# EAGLE board ENERGIS_Rack-PDU_1.0.0 (EAGLE 9.2.1), part 1 of 3
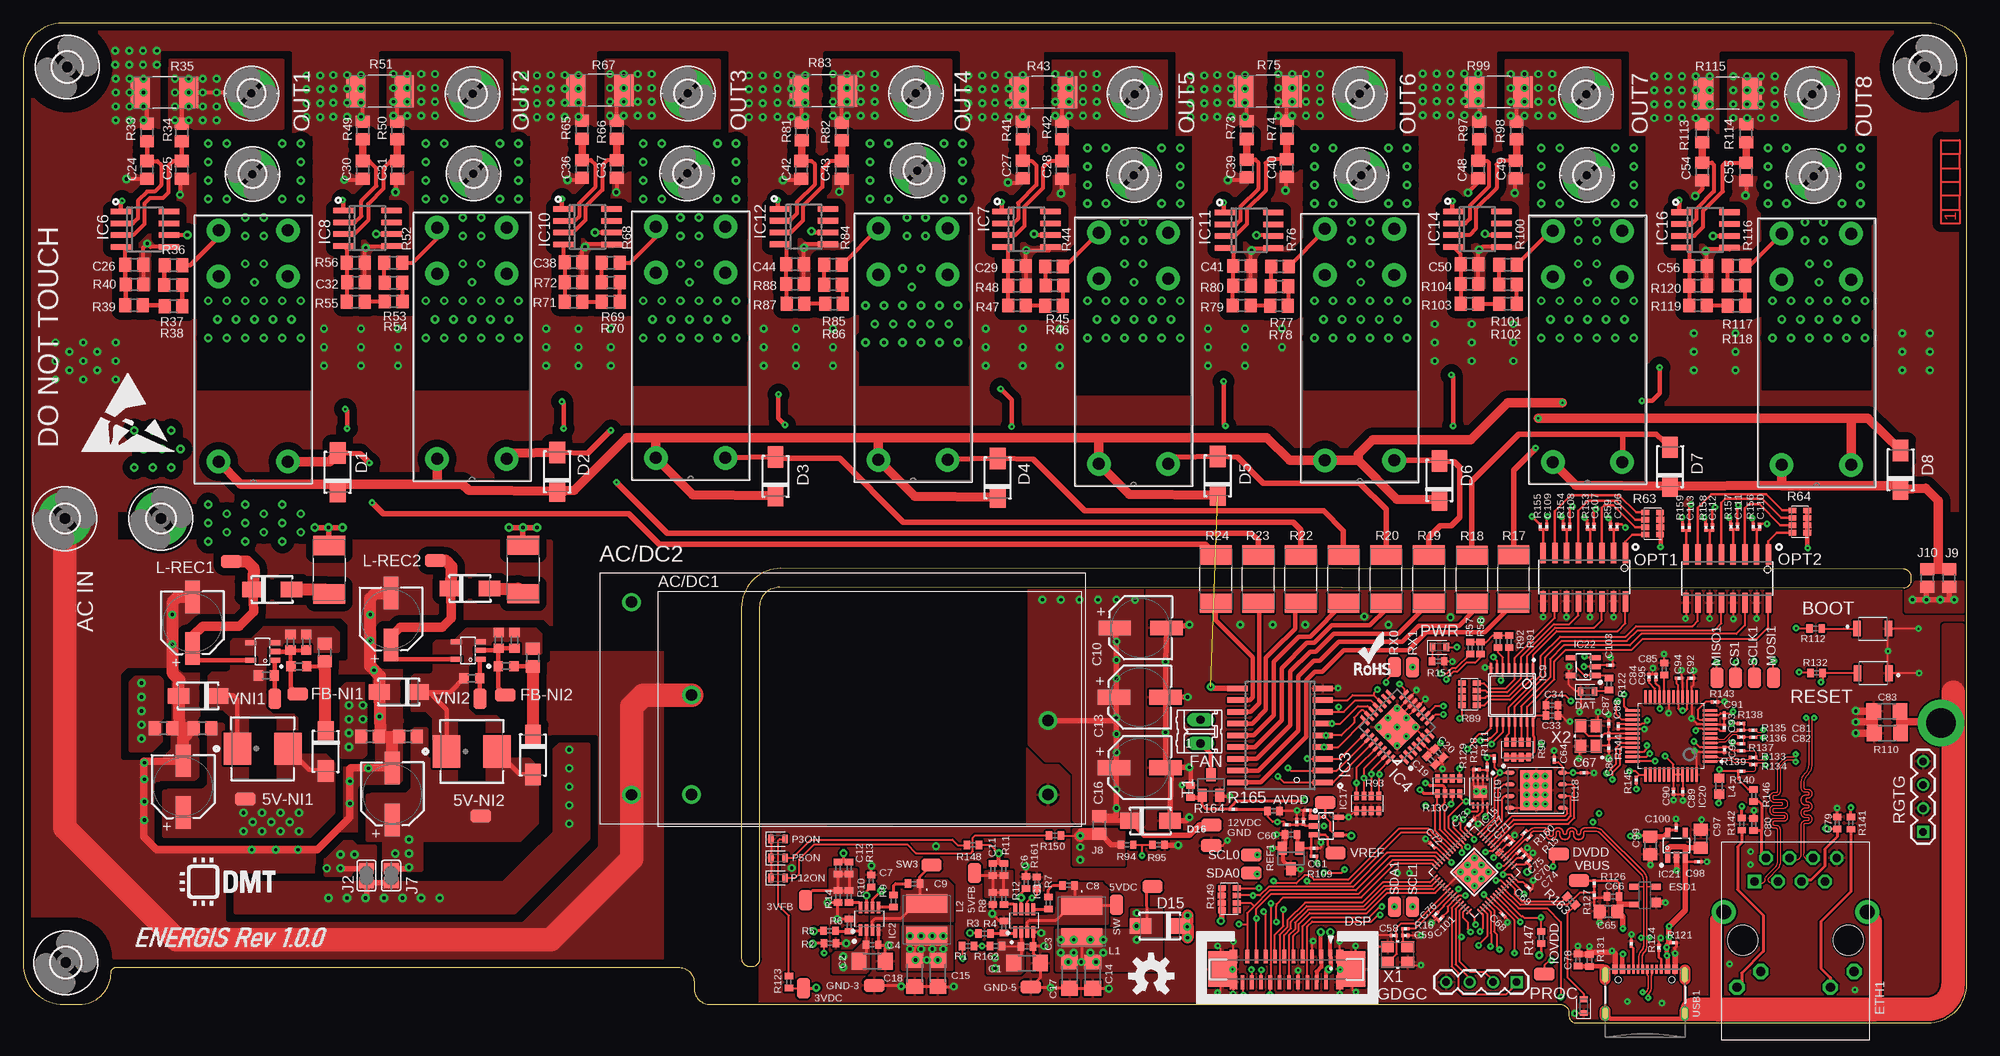
[diagram p0: board, top side]
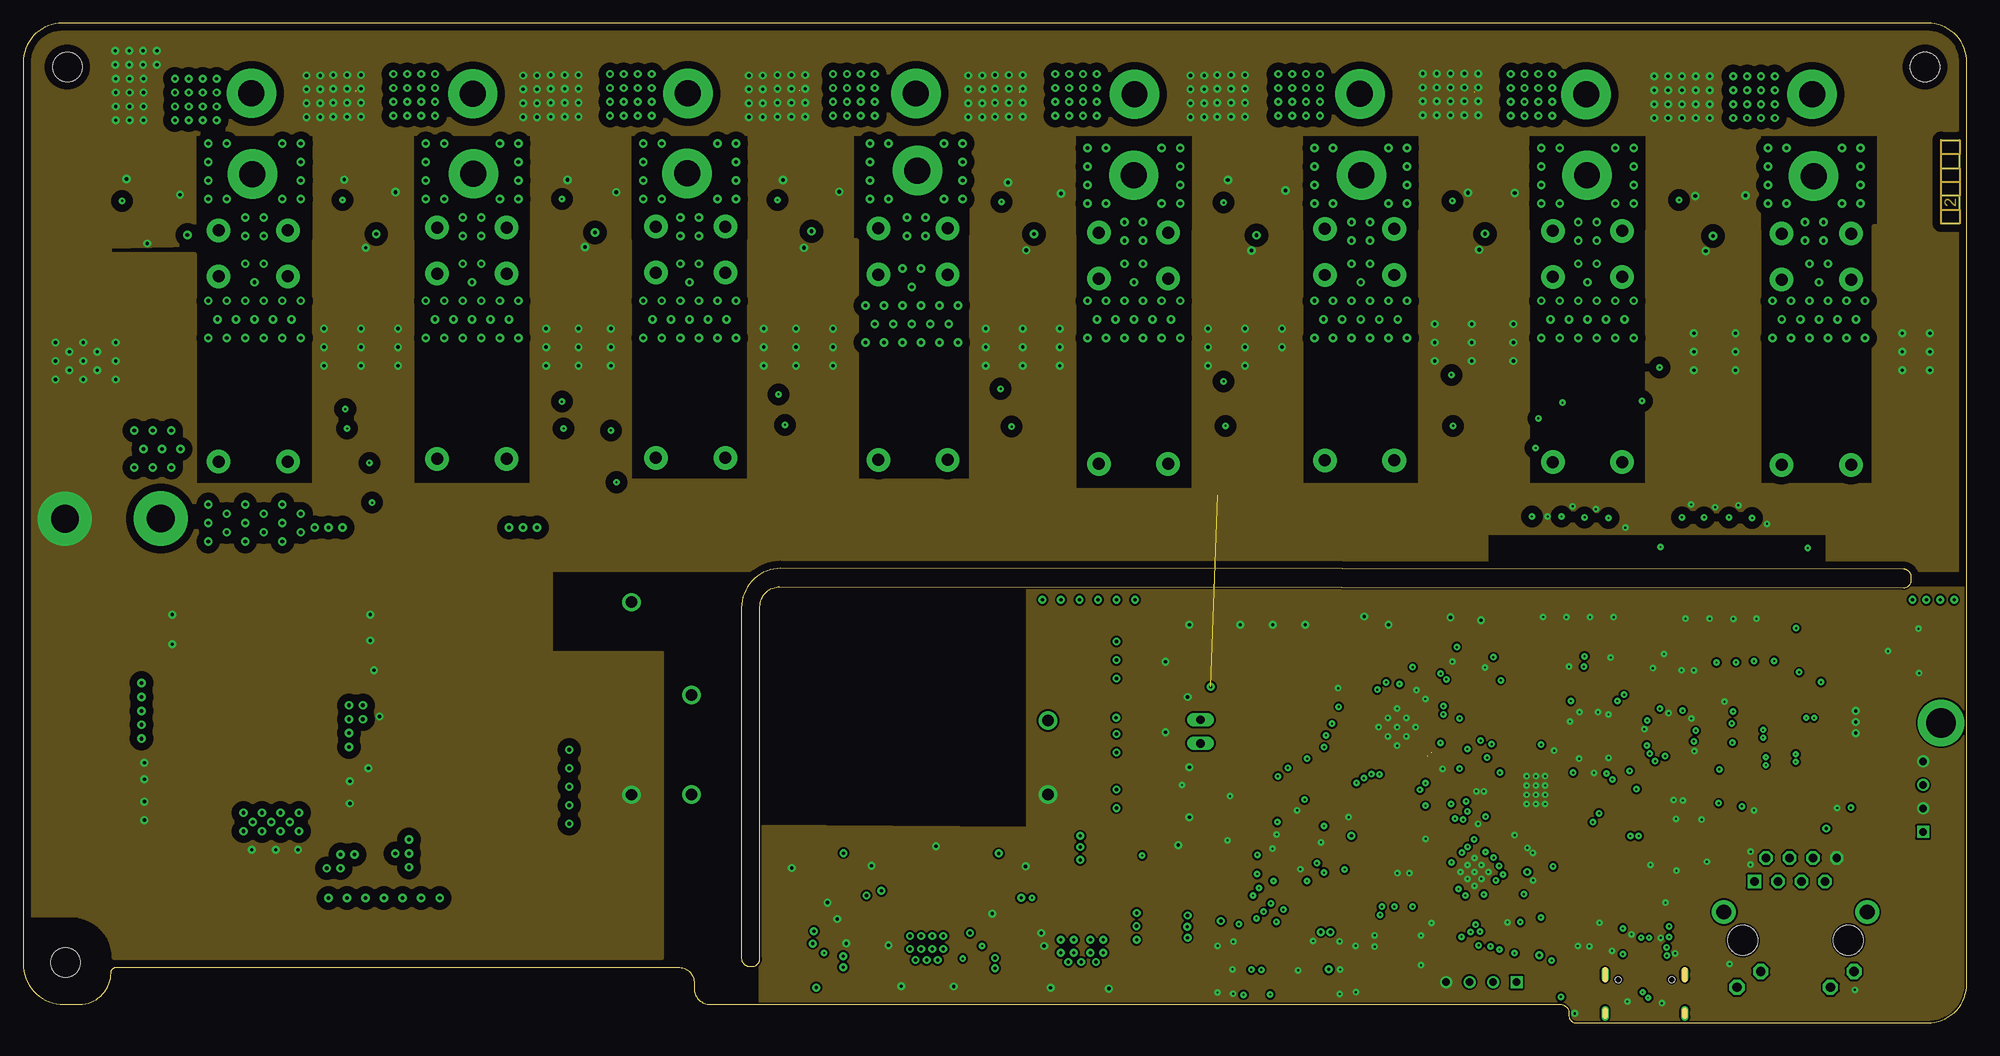
[diagram p1: board, inner layer GND/AGND]
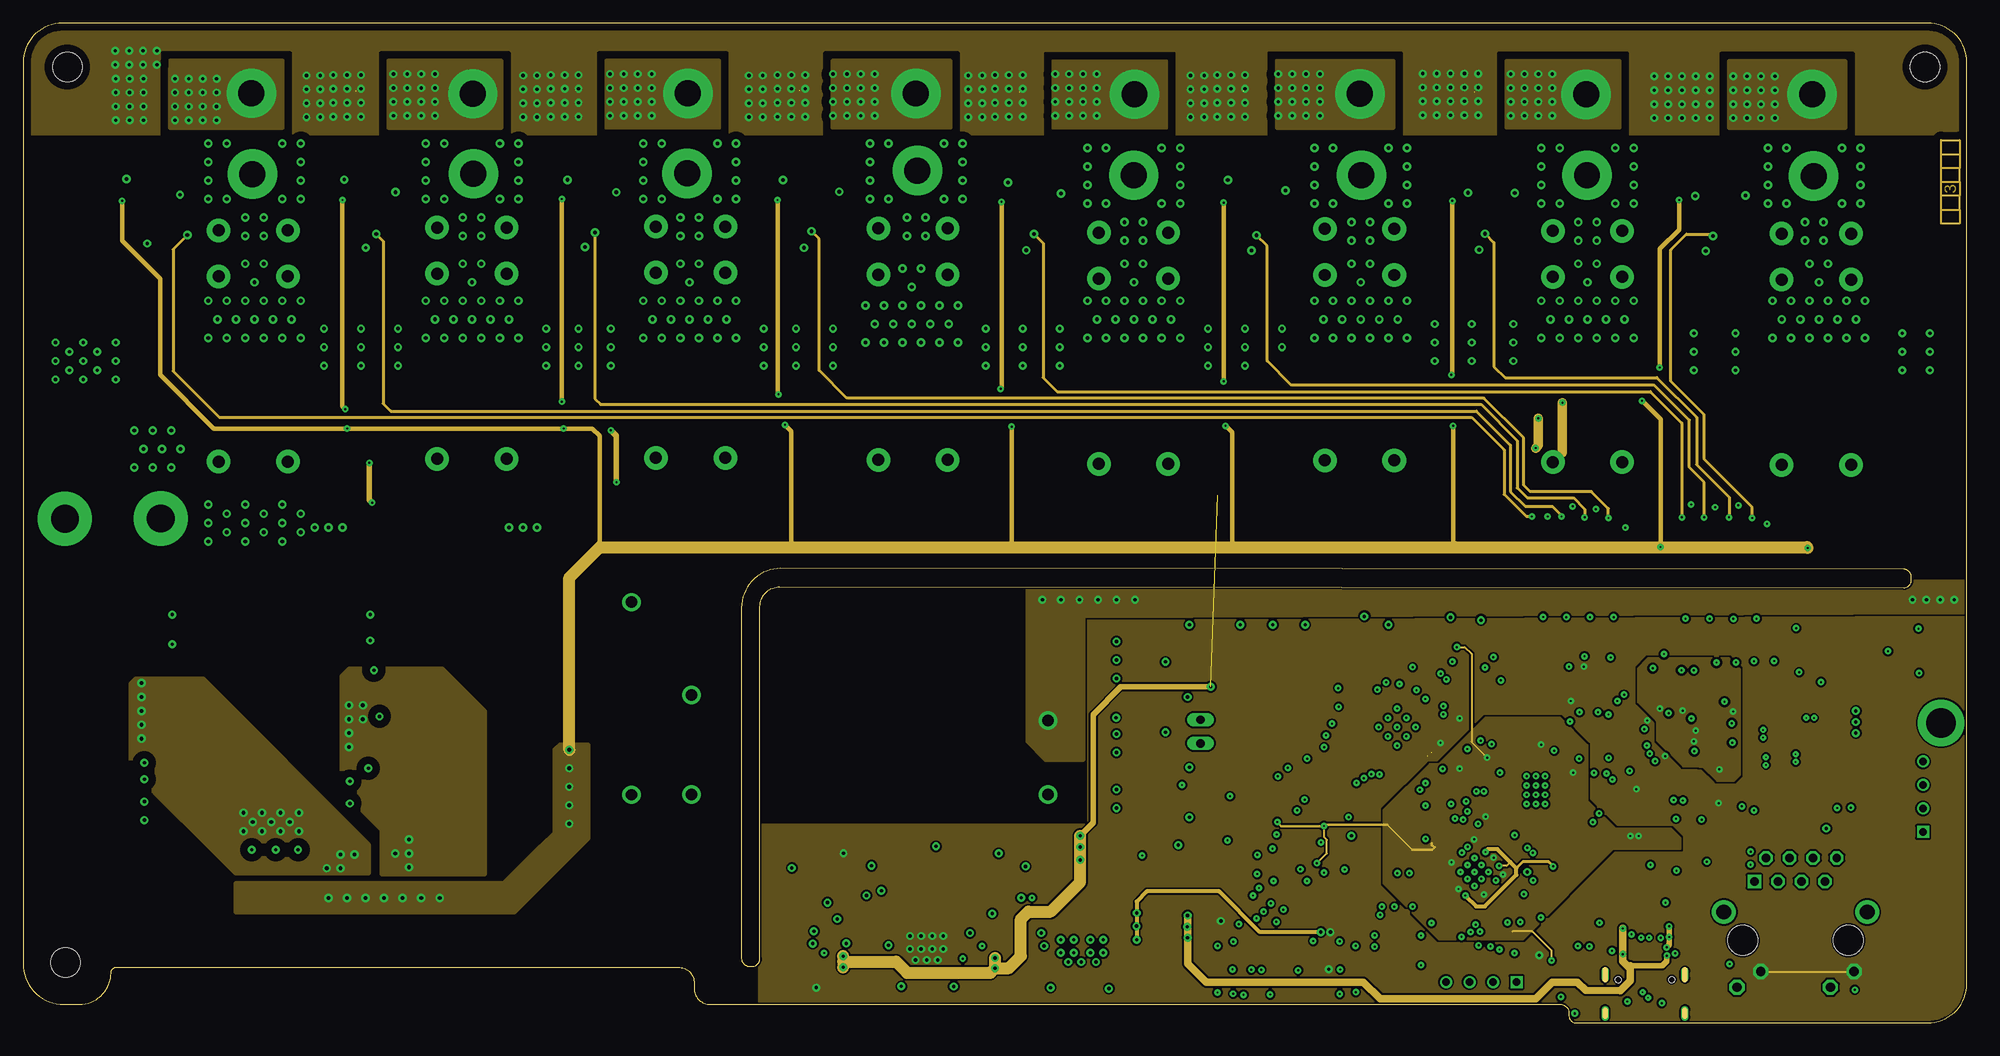
[diagram p2: board, inner layer PWR-3/SIG]
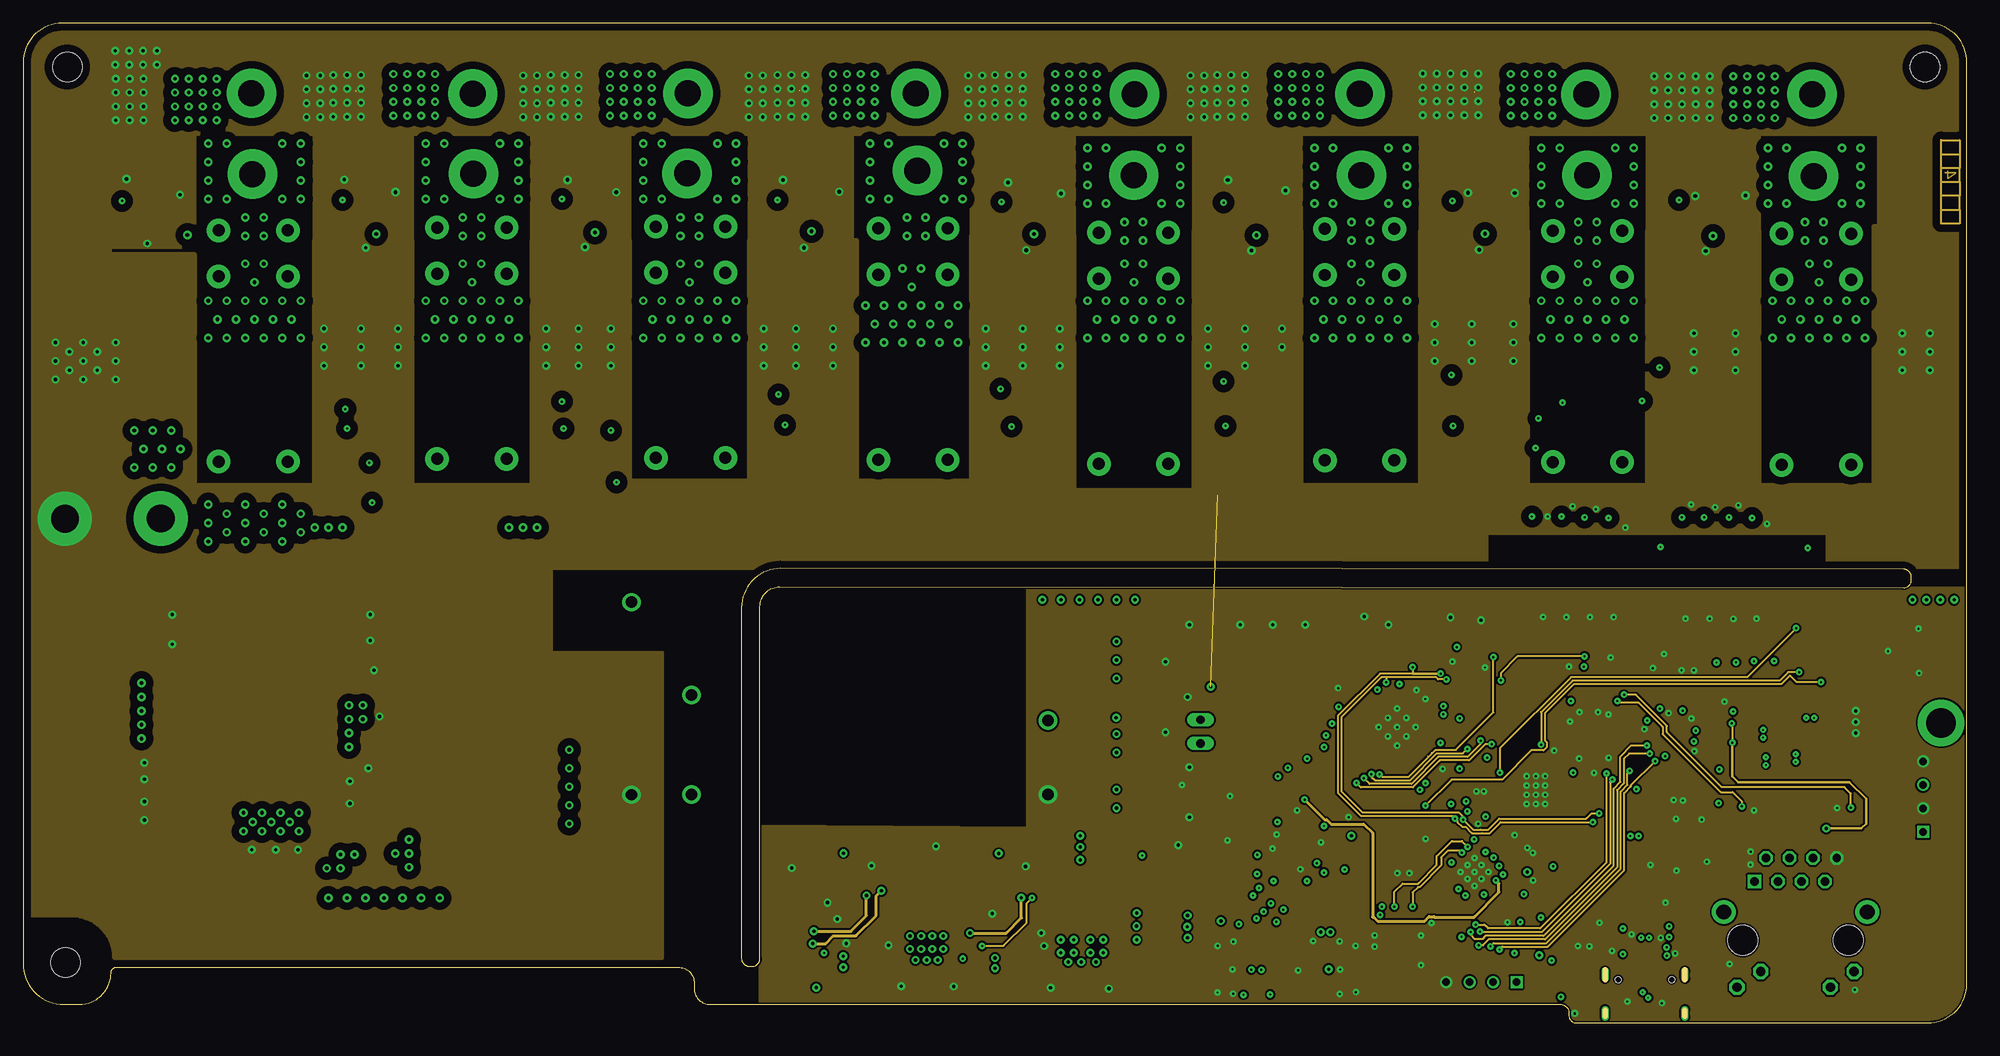
[diagram p3: board, inner layer SIG/AGND]
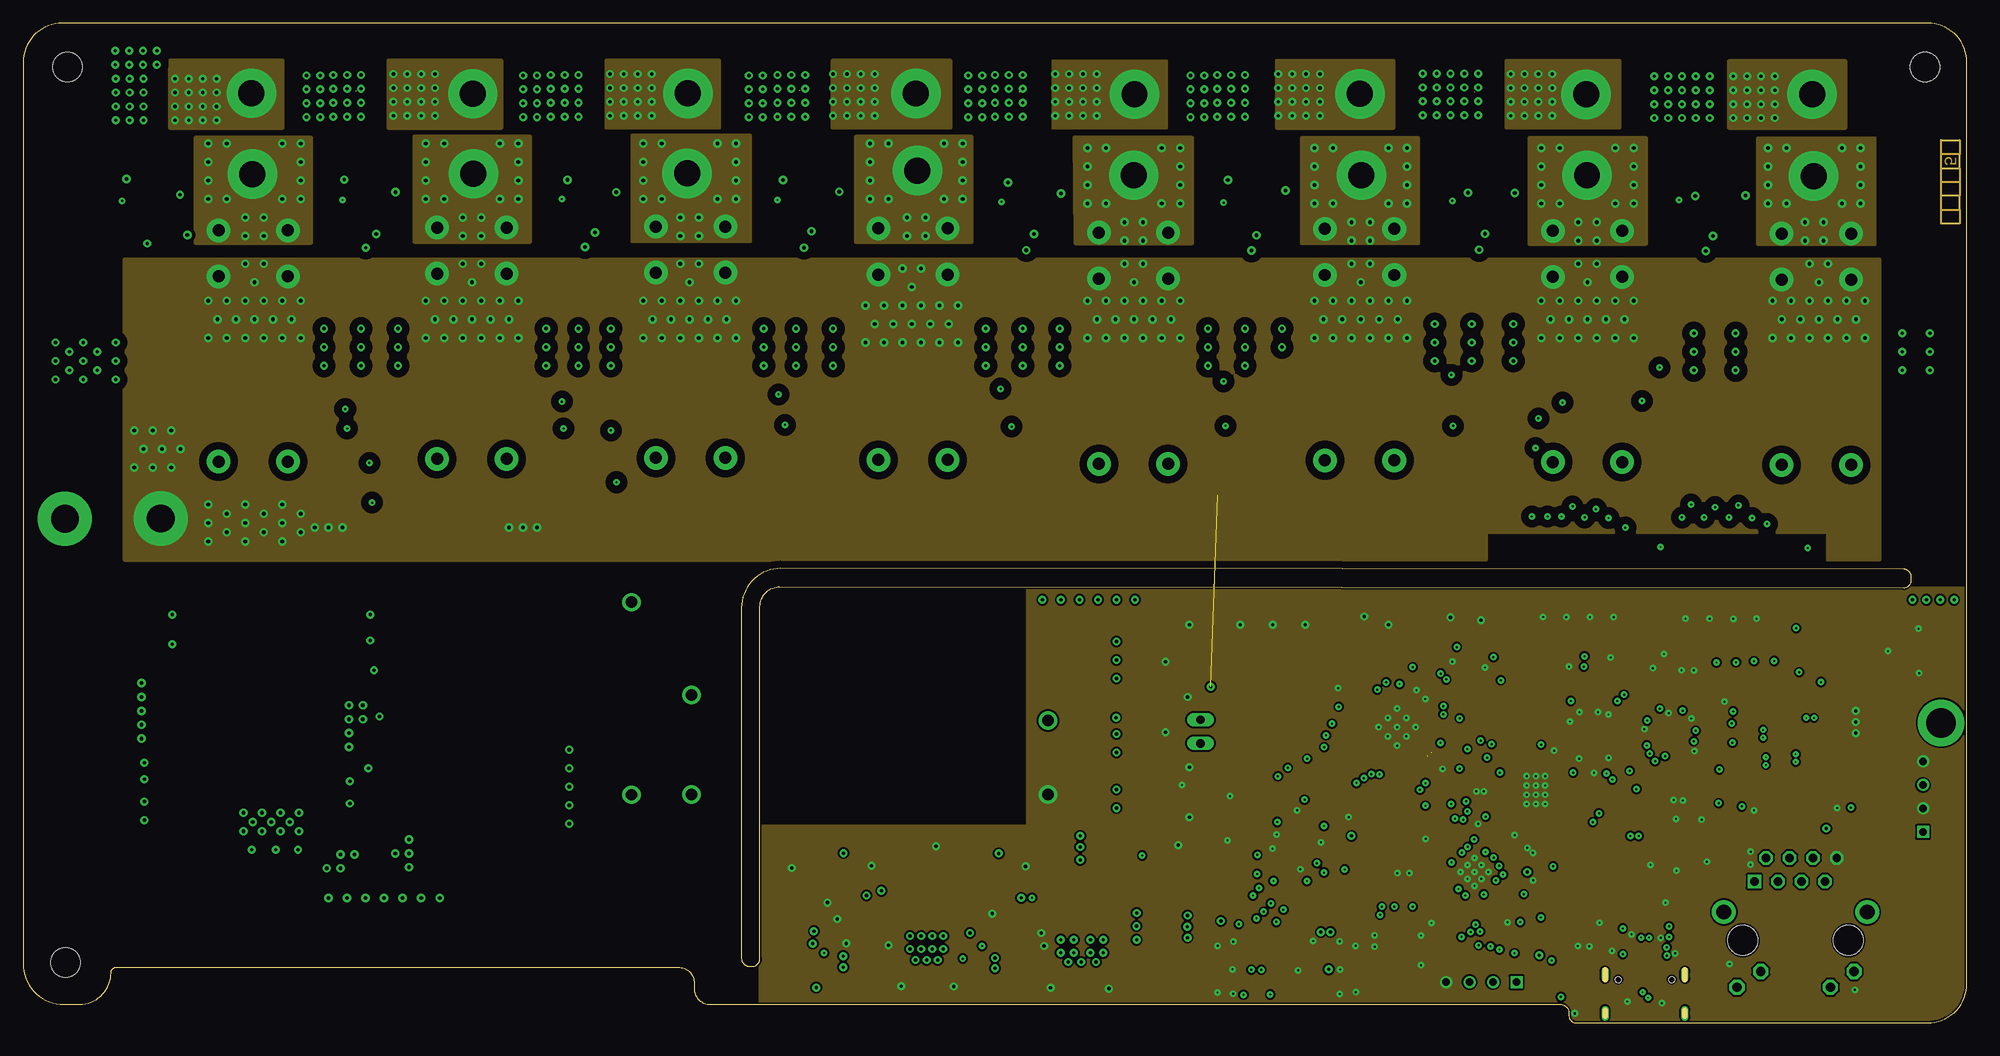
[diagram p4: board, inner layer GND-2/AC_L]
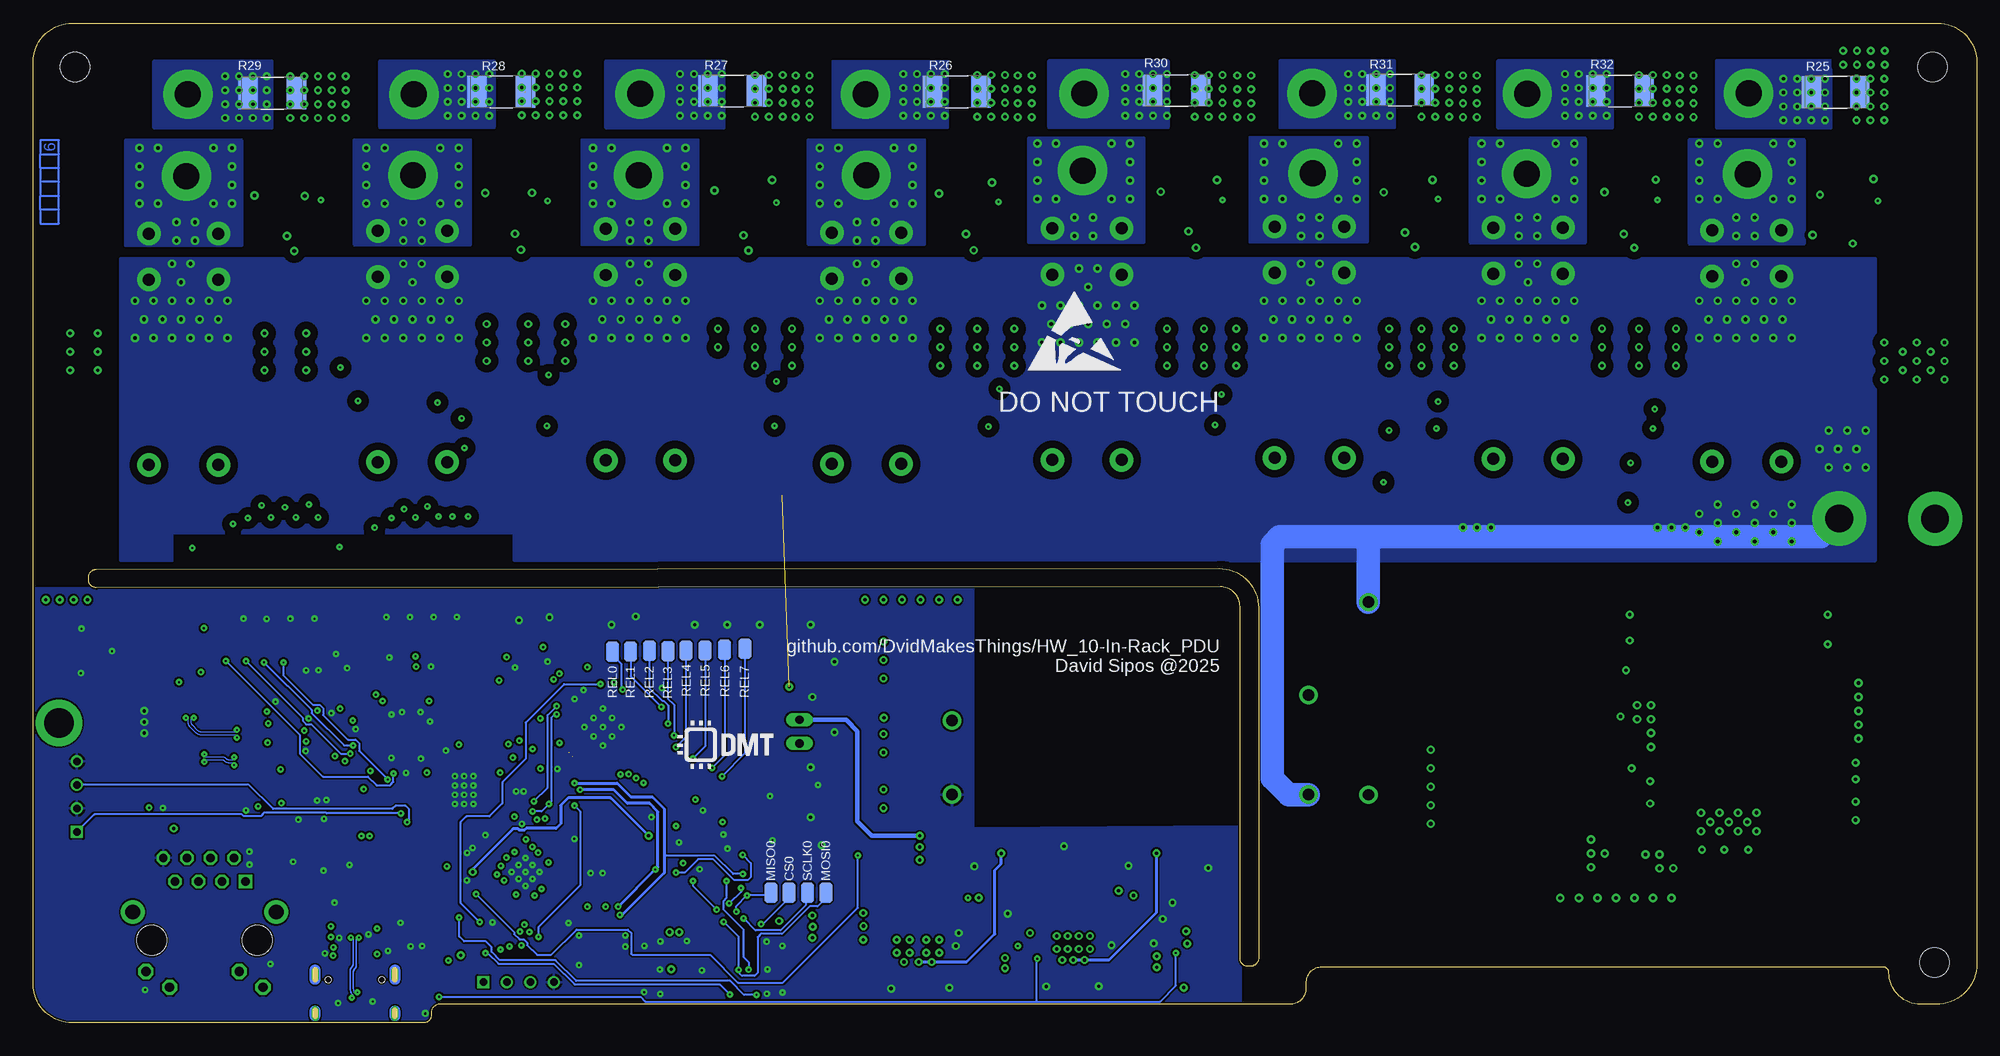
[diagram p5: board, bottom side, seen from below]

Size 210 x 108 mm. Coordinates in mm from the lower left corner, seen from the top.
Outline: 210,4.23 210,103.77 arc90 205.77,108 4.23,108 arc90 0,103.77 0,6.39 arc90 4.39,2 6.08,2 arc90 9.5,5.42 arc-90 10.08,6 70.79,6 arc-90 72.5,4.29 72.5,3.71 arc90 74.21,2 166.06,2 arc-90 167,1.06 167,0.77 arc90 167.77,0 205.77,0 arc90 210,4.23
Outline: 81.73,47.1 203.15,47 arc90 204,47.85 204,48.15 arc90 203.15,49 81.86,49.1 arc90 77.6,44.84 77.6,7 arc90 78.5,6.1 78.78,6.1 arc90 79.6,6.92 79.6,44.97 arc-90 81.73,47.1
Copper layers (1+2*3+14*15+16): SIG_HS/SIG 0.035mm / dielectric 0.0994mm / GND/AGND 0.0152mm / dielectric 0.55mm / PWR-3/SIG 0.0152mm / dielectric 0.1088mm / SIG/AGND 0.0152mm / dielectric 0.55mm / GND-2/AC_L 0.0152mm / dielectric 0.0994mm / SIG_BTM/AC_L 0.035mm
Design rules "JLC06161H-3313A_6-layer_1.6 mm-Standard": minimum track width 3.5mil, minimum drill 0.15mm, track to track 3.5mil, track to pad 3.5mil, pad to pad 3.5mil, via to via 3.5mil, smd to smd 3.5mil, copper to edge 0.2mm, drill to drill 6mil, minimum pad ring 8mil, minimum via ring 0.25mm, stop-mask expansion 0.05mm, vias tented up to drill 16mil, thermal gap 10mil
Net classes: 0 50R_SE: width 0.2 mm, drill 0.2 mm, clearance 0.178 mm; 1 100R_DIFFPAIR: width 0.121 mm, drill 0.15 mm, clearance 0.191 mm; 2 90R_DIFFPAIR: width 0.155 mm, drill 0.15 mm, clearance 0.191 mm; 3 AC_MEA: width 0.406 mm, drill 0.35 mm, clearance 0.203 mm; 4 AC_SIG: width 0.305 mm, drill 0.2 mm, clearance 0.35 mm

## Footprints (pad centres in the part's own frame; a part is rotated, then mirrored left to right if it is on the bottom)
TP = smd 2.2 x 1.4: TP 0,0
IRM_10_12 = drill 1.24: +V 19.25,0.02; -V 19.25,-7.98; AC_L -19.25,-7.98; AC_N -19.25,2.77
IRM_15_12 = drill 1.24: +V 23.47,-2.4; -V 23.47,-10.4; AC/L -21.53,10.4; AC/N -21.53,-10.4
3,0-PAD = drill 3 pad 5.842: B3,0 0,0
B3U-1000P = smd 0.8 x 1.7: 1 -1.7,0; 2 1.7,0
1206 = smd 1.6 x 1.803: 1 -1.422,0; 2 1.422,0
0402 = smd 0.7 x 0.9: 1 -0.65,0; 2 0.65,0
0603 = smd 1 x 1.1: 1 -0.85,0; 2 0.85,0
6.3X7.7(DXL) = smd 3.5 x 1.6: 1 2.8,0; 2 -2.8,0
0805 = smd 1.3 x 1.5: 1 -0.95,0; 2 0.95,0
0201 = smd 0.34 x 0.35: 1 -0.275,0; 2 0.275,0
C1206 = smd 1.6 x 1.803: 1 -1.422,0; 2 1.422,0
SMA/DO-214AC = smd 2.3 x 1.7: A 2.1,0; C -2.1,0
LED-0603 = smd 0.612 x 0.912: A 0.75,0; C -0.75,0
FPC20 = smd 0.4 x 1.5: 1 -4.552,-1.362; 2 -4.052,1.438; 3 -3.552,-1.362; 4 -3.052,1.438; 5 -2.552,-1.362; 6 -2.052,1.438; 7 -1.552,-1.362; 8 -1.052,1.438; 9 -0.552,-1.362; 10 -0.052,1.438; 11 0.448,-1.362; 12 0.948,1.438; 13 1.448,-1.362; 14 1.948,1.438; 15 2.448,-1.362; 16 2.948,1.438; 17 3.448,-1.362; 18 3.948,1.438; 19 4.448,-1.362; 20 4.948,1.438 | smd 3.048 x 3.81: Z0 -6.795,0; Z5 7.112,0 | smd 0.8 x 1.5: Z1 -5.552,-1.362; Z2 -5.552,1.438; Z3 5.948,-1.362; Z4 5.948,1.438
SOT143 = smd 1 x 1: 1 -0.75,-1.2 | smd 0.6 x 1: 2 0.95,-1.2; 3 0.95,1.2; 4 -0.95,1.2
J1B1211CCD = drill 0.9 square: 1 -4.445,6.35 | drill 0.9 octagon: 2 -3.175,8.89; 3 -1.905,6.35; 4 -0.635,8.89; 5 0.635,6.35; 6 1.905,8.89; 7 3.175,6.35; 8 4.445,8.89 | drill 1.02 octagon: 9 -6.325,-5.08; 10 -3.758,-3.38; 11 3.758,-5.08; 12 6.325,-3.38 | drill 1.6: 13 -7.75,3.05; 14 7.75,3.05 | hole 3.25: -5.715,0; 5.715,0
02P = drill 0.914 long: 1 -1.27,0; 2 1.27,0
1X4 = drill 0.8 square: 1 0,3.81 | drill 0.8: 2 0,1.27; 3 0,-1.27; 4 0,-3.81
SOT65P280X110-8N = smd 1.259 x 0.4: 1 -1.228,0.975; 2 -1.228,0.325; 3 -1.228,-0.325; 4 -1.228,-0.975; 5 1.228,-0.975; 6 1.228,-0.325; 7 1.228,0.325; 8 1.228,0.975
SO18 = smd 0.6 x 2.2: 1 -5.08,-4.6; 2 -3.81,-4.6; 3 -2.54,-4.6; 4 -1.27,-4.6; 5 0,-4.6; 6 1.27,-4.6; 7 2.54,-4.6; 8 3.81,-4.6; 9 5.08,-4.6; 10 5.08,4.6; 11 3.81,4.6; 12 2.54,4.6; 13 1.27,4.6; 14 0,4.6; 15 -1.27,4.6; 16 -2.54,4.6; 17 -3.81,4.6; 18 -5.08,4.6
QFN28[6X6]ML = smd 1.27 x 0.35: 1 -2.985,1.95; 2 -2.985,1.3; 3 -2.985,0.65; 4 -2.985,0; 5 -2.985,-0.65; 6 -2.985,-1.3; 7 -2.985,-1.95; 15 2.985,-1.95; 16 2.985,-1.3; 17 2.985,-0.65; 18 2.985,0; 19 2.985,0.65; 20 2.985,1.3; 21 2.985,1.95 | smd 0.35 x 1.27: 8 -1.95,-2.985; 9 -1.3,-2.985; 10 -0.65,-2.985; 11 0,-2.985; 12 0.65,-2.985; 13 1.3,-2.985; 14 1.95,-2.985; 22 1.95,2.985; 23 1.3,2.985; 24 0.65,2.985; 25 0,2.985; 26 -0.65,2.985; 27 -1.3,2.985; 28 -1.95,2.985 | smd 3.7 x 3.7: PAD 0,0
SOT23-5 = smd 0.55 x 1.2: 1 -0.95,-1.3; 2 0,-1.3; 3 0.95,-1.3; 4 0.95,1.3; 5 -0.95,1.3
SO8 = smd 0.6 x 2.2: 1 -1.905,-2.6; 2 -0.635,-2.6; 3 0.635,-2.6; 4 1.905,-2.6; 5 1.905,2.6; 6 0.635,2.6; 7 -0.635,2.6; 8 -1.905,2.6
TSSOP16 = smd 0.305 x 0.991: 1 -2.275,-2.918; 2 -1.625,-2.918; 3 -0.975,-2.918; 4 -0.325,-2.918; 5 0.325,-2.918; 6 0.975,-2.918; 7 1.625,-2.918; 8 2.275,-2.918; 9 2.275,2.918; 10 1.625,2.918; 11 0.975,2.918; 12 0.325,2.918; 13 -0.325,2.918; 14 -0.975,2.918; 15 -1.625,2.918; 16 -2.275,2.918
QFN56 = smd 0.837 x 0.22: 1 -3.437,2.6; 2 -3.437,2.2; 3 -3.437,1.8; 4 -3.437,1.4; 5 -3.437,1; 6 -3.437,0.6; 7 -3.437,0.2; 8 -3.437,-0.2; 9 -3.437,-0.6; 10 -3.437,-1; 11 -3.437,-1.4; 12 -3.437,-1.8; 13 -3.437,-2.2; 14 -3.437,-2.6; 29 3.437,-2.6; 30 3.437,-2.2; 31 3.437,-1.8; 32 3.437,-1.4; 33 3.437,-1; 34 3.437,-0.6; 35 3.437,-0.2; 36 3.437,0.2; 37 3.437,0.6; 38 3.437,1; 39 3.437,1.4; 40 3.437,1.8; 41 3.437,2.2; 42 3.437,2.6 | smd 0.22 x 0.837: 15 -2.6,-3.437; 16 -2.2,-3.437; 17 -1.8,-3.437; 18 -1.4,-3.437; 19 -1,-3.437; 20 -0.6,-3.437; 21 -0.2,-3.437; 22 0.2,-3.437; 23 0.6,-3.437; 24 1,-3.437; 25 1.4,-3.437; 26 1.8,-3.437; 27 2.2,-3.437; 28 2.6,-3.437; 43 2.6,3.437; 44 2.2,3.437; 45 1.8,3.437; 46 1.4,3.437; 47 1,3.437; 48 0.6,3.437; 49 0.2,3.437; 50 -0.2,3.437; 51 -0.6,3.437; 52 -1,3.437; 53 -1.4,3.437; 54 -1.8,3.437; 55 -2.2,3.437; 56 -2.6,3.437 | smd 3.2 x 3.2: PAD 0,0
SON127P600X500X75-8N = smd 1.012 x 0.432: 1 -2.85,1.905; 2 -2.85,0.635; 3 -2.85,-0.635; 4 -2.85,-1.905; 5 2.85,-1.905; 6 2.85,-0.635; 7 2.85,0.635; 8 2.85,1.905 | smd 3.4 x 4.3: PAD 0,0
SON50P300X200X50-9T130X140N = smd 0.711 x 0.27: 1 -1.501,0.75; 2 -1.501,0.25; 3 -1.501,-0.25; 4 -1.501,-0.75; 5 1.501,-0.75; 6 1.501,-0.25; 7 1.501,0.25; 8 1.501,0.75 | smd 1.3 x 1.4: 9 0,0
LQFP48 = smd 1.56 x 0.28: 1 -4.18,2.75; 2 -4.18,2.25; 3 -4.18,1.75; 4 -4.18,1.25; 5 -4.18,0.75; 6 -4.18,0.25; 7 -4.18,-0.25; 8 -4.18,-0.75; 9 -4.18,-1.25; 10 -4.18,-1.75; 11 -4.18,-2.25; 12 -4.18,-2.75; 25 4.18,-2.75; 26 4.18,-2.25; 27 4.18,-1.75; 28 4.18,-1.25; 29 4.18,-0.75; 30 4.18,-0.25; 31 4.18,0.25; 32 4.18,0.75; 33 4.18,1.25; 34 4.18,1.75; 35 4.18,2.25; 36 4.18,2.75 | smd 0.28 x 1.56: 13 -2.75,-4.18; 14 -2.25,-4.18; 15 -1.75,-4.18; 16 -1.25,-4.18; 17 -0.75,-4.18; 18 -0.25,-4.18; 19 0.25,-4.18; 20 0.75,-4.18; 21 1.25,-4.18; 22 1.75,-4.18; 23 2.25,-4.18; 24 2.75,-4.18; 37 2.75,4.18; 38 2.25,4.18; 39 1.75,4.18; 40 1.25,4.18; 41 0.75,4.18; 42 0.25,4.18; 43 -0.25,4.18; 44 -0.75,4.18; 45 -1.25,4.18; 46 -1.75,4.18; 47 -2.25,4.18; 48 -2.75,4.18
SJ = smd 1.168 x 1.6: 1 -0.762,0; 2 0.762,0
RELAY_G2RL-1A-E_DC5_OMR = drill 1.295 pad 2.54: 1 -3.683,12.776; 3 -3.683,-7.239; 4 -3.683,-12.217; 5 3.81,-12.217; 6 3.81,-7.239; 8 3.81,12.776
SRR5228A = smd 4.4 x 2: 1 0,1.75; 2 0,-1.75
L-6.6X6.6 = smd 2.95 x 3.5: 1 -2.725,0; 2 2.725,0
2,8-PAD = drill 2.8 pad 5.334: B2,8 0,0
SO16 = smd 0.61 x 2.21: 1 -4.445,-2.616; 2 -3.175,-2.616; 3 -1.905,-2.616; 4 -0.635,-2.616; 5 0.635,-2.616; 6 1.905,-2.616; 7 3.175,-2.616; 8 4.445,-2.616; 9 4.445,2.616; 10 3.175,2.616; 11 1.905,2.616; 12 0.635,2.616; 13 -0.635,2.616; 14 -1.905,2.616; 15 -3.175,2.616; 16 -4.445,2.616
2512 = smd 2.08 x 3.44: 1 -2.616,0; 2 2.616,0
_0603X4-1206 = smd 0.59 x 0.92: A1 -1.2,-0.8; A2 -1.2,0.8; B1 -0.4,-0.8; B2 -0.4,0.8; C1 0.4,-0.8; C2 0.4,0.8; D1 1.2,-0.8; D2 1.2,0.8
R0201 = smd 0.34 x 0.35: 1 -0.275,0; 2 0.275,0
SOT23 = smd 1 x 1.4: 1 -0.95,-1.1; 2 0.95,-1.1; 3 0,1.1
3,2 = hole 3.2: 0,0
USB-C = smd 0.3 x 1: A5 -1.18,3.37; A6 -0.18,3.37; A7 0.32,3.37; A8 1.32,3.37; B5 1.82,3.37; B6 0.82,3.37; B7 -0.68,3.37; B8 -1.68,3.37 | smd 0.6 x 1: GND -3.155,3.37; GND2 3.295,3.37; VBUS1 -2.38,3.37; VBUS2 2.52,3.37 | drill 0.4 pad 0.6 long: SHLD1 -4.248,2.795; SHLD2 4.388,2.795; SHLD3 -4.248,-1.385; SHLD4 4.388,-1.385 | hole 0.65: -2.82,2.265; 2.96,2.265
WE-XTAL_CFPX-180 = smd 1.4 x 1.2: 1 -1.1,-0.85; 2 1.1,-0.85; 3 1.1,0.85; 4 -1.1,0.85

## Placement (x,y rotation side)
3VDC  TP  [TP]  84.29,3.72 90 top
3VFB  TP  [TP]  84.53,13.24 270 top
5V-NI1  TP  [TP]  23.99,24.18 0 top
5V-NI2  TP  [TP]  49.43,22.32 180 top
5VDC  TP  [TP]  122.01,14.72 180 top
5VFB  TP  [TP]  102.79,16.18 270 top
12VDC  TP  [TP]  128.39,21.39 0 top
AC/DC1  IRM_10_12  [IRM_10_12]  91.47,32.64 0 top
AC/DC2  IRM-10-15  [IRM_15_12]  87.27,35.04 0 top
AC_L  MOUNT-PAD-ROUND3.0  [3,0-PAD]  14.88,54.48 0 top
AC_N  MOUNT-PAD-ROUND3.0  [3,0-PAD]  4.51,54.47 0 top
AVDD  TP  [TP]  140.65,23.79 180 top
BOOT  B3U-1000P  [B3U-1000P]  199.81,42.59 0 top
C1  22uF 25V  [1206]  108.46,6.45 0 top
C2  22uF 25V  [1206]  91.73,6.64 0 top
C3  100nF 25V  [0402]  108.46,8.25 0 top
C4  100nF 25V  [0402]  91.73,8.44 0 top
C5  1nF 50V  [0603]  28.88,41.11 270 top
C6  100nF 25V  [0402]  108.36,15.15 90 top
C7  100nF 25V  [0402]  91.63,15.34 90 top
C8  100nF 25V  [0402]  112.96,14.85 0 top
C9  100nF 25V  [0402]  96.23,15.04 0 top
C10  100uF 25V  [6.3X7.7(DXL)]  120.73,42.66 180 top
C11  33pF 50V  [0402]  104.76,16.55 270 top
C12  33pF 50V  [0402]  88.03,16.74 270 top
C13  100uF 25V  [6.3X7.7(DXL)]  120.63,35.16 180 top
C14  22uF 25V  [1206]  115.56,5.15 270 top
C15  22uF 25V  [1206]  98.83,5.34 270 top
C16  100uF 25V  [6.3X7.7(DXL)]  120.63,27.56 180 top
C17  22uF 25V  [1206]  113.06,5.15 270 top
C18  22uF 25V  [1206]  96.33,5.34 270 top
C19  100nF 25V  [0402]  152.13,28.36 315 top
C20  100nF 25V  [0402]  152.95,29.14 315 top
C21  2.2uF 50V  [0603]  26.28,37.51 0 top
C22  220nF 50V  [0805]  32.58,40.01 270 top
C23  100uF 50V  [6.3X7.7(DXL)]  17.28,25.51 270 top
C24  33nF 50V  [0805]  13.38,92.16 270 top
C25  33nF 50V  [0805]  17.13,92.16 270 top
C26  33nF 50V  [0805]  12,81.9 0 top
C27  33nF 50V  [0805]  107.98,92.18 270 top
C28  33nF 50V  [0805]  112.23,92.16 270 top
C29  33nF 50V  [0805]  107.37,81.76 0 top
C30  33nF 50V  [0805]  36.68,92.16 270 top
C31  33nF 50V  [0805]  40.43,92.16 270 top
C32  33nF 50V  [0805]  35.95,79.99 0 top
C33  100nF 25V  [0402]  165.15,33.21 0 top
C34  100nF 25V  [0402]  165.15,34.31 0 top
C35  2.2uF 400V  [6.3X7.7(DXL)]  18.29,43.22 270 top
C36  33nF 50V  [0805]  60.38,92.26 270 top
C37  33nF 50V  [0805]  64.13,92.26 270 top
C38  33nF 50V  [0805]  59.47,82.16 0 top
C39  33nF 50V  [0805]  132.2,92.31 270 top
C40  33nF 50V  [0805]  136.53,92.36 270 top
C41  33nF 50V  [0805]  131.67,81.76 0 top
C42  33nF 50V  [0805]  84.08,92.16 270 top
C43  33nF 50V  [0805]  88.43,92.16 270 top
C44  33nF 50V  [0805]  83.37,81.96 0 top
C45  1uF 50V  [0805]  19.38,31.81 0 top
C46  2.2uF 50V  [0603]  48.48,37.23 0 top
C47  2.2uF 400V  [6.3X7.7(DXL)]  39.74,43.62 270 top
C48  33nF 50V  [0805]  157.2,92.17 270 top
C49  33nF 50V  [0805]  161.23,92.17 270 top
C50  33nF 50V  [0805]  156.25,81.96 0 top
C51  1nF 50V  [0603]  51.38,41.33 270 top
C52  220nF 50V  [0805]  55.05,39.44 270 top
C53  100uF 50V  [6.3X7.7(DXL)]  39.88,24.73 270 top
C54  33nF 50V  [0805]  181.39,91.97 270 top
C55  33nF 50V  [0805]  186.13,91.97 270 top
C56  33nF 50V  [0805]  180.95,81.76 0 top
C57  1uF 50V  [0805]  41.58,30.93 0 top
C58  15pF 50V  [0201]  148.06,9.44 180 top
C59  15pF 50V  [0201]  149.34,9.44 0 top
C60  1uF 25V  [0402]  136.99,20.35 180 top
C61  100nF 25V  [0201]  139.46,18.87 0 top
C62  100nF 25V  [0201]  138.76,22.96 180 top
C63  100nF 25V  [0201]  138.31,21.72 90 top
C64  100nF 25V  [0201]  165.41,28.43 90 top
C65  10uF 50V  [0805]  171.29,12.03 180 top
C66  100nF 25V  [0402]  171.78,13.65 180 top
C67  100nF 25V  [0201]  168.64,27.01 0 top
C68  100nF 25V  [0201]  159.86,11.69 315 top
C69  100nF 25V  [0201]  162.64,14.61 315 top
C70  100nF 25V  [0201]  162.15,18.03 45 top
C71  100nF 25V  [0201]  160.75,19.43 45 top
C72  100nF 25V  [0201]  152.26,19.16 135 top
C73  100nF 25V  [0201]  156.53,21.86 45 top
C74  100nF 25V  [0201]  162.66,17.53 45 top
C75  100nF 25V  [0201]  161.64,18.55 45 top
C76  100nF 25V  [0201]  153.13,11.25 225 top
C77  100nF 25V  [0201]  160.25,19.95 45 top
C78  4.7nF 50V  [0402]  167.97,6.77 90 top
C79  100nF 25V  [0402]  195.99,21.6 90 top
C80  22nF 50V  [0402]  186.96,21.43 90 top
C81  6.8nF 50V  [0201]  186.9,30.86 0 top
C82  6.8nF 50V  [0201]  186.89,31.6 0 top
C83  C1206C102KGRACTM  [C1206]  201.34,33.65 0 top
C84  100nF 25V  [0201]  175.66,37.36 90 top
C85  4.7uF 25V  [0402]  177.29,38.24 90 top
C86  18pF 50V  [0201]  171.3,29.67 270 top
C87  18pF 50V  [0201]  171.3,32.31 90 top
C88  100nF 25V  [0201]  172.32,32.03 270 top
C89  100nF 25V  [0201]  179.3,24.97 270 top
C90  100nF 25V  [0201]  178.3,24.97 270 top
C91  100nF 25V  [0201]  183.79,33.19 270 top
C92  100nF 25V  [0201]  180.2,37.22 0 top
C93  100nF 25V  [0201]  183.79,31.89 90 top
C94  100nF 25V  [0201]  178.9,37.22 0 top
C95  100nF 25V  [0201]  176.4,37.37 90 top
C96  100nF 25V  [0201]  183.8,29.49 270 top
C97  10uF 50V  [0805]  181.23,19.89 90 top
C98  100nF 25V  [0201]  181,17.4 0 top
C99  10uF 50V  [0805]  175.81,19.14 270 top
C100  100nF 25V  [0201]  178.59,21.07 90 top
C101  100nF 25V  [0201]  152.63,11.75 225 top
C102  1uF 16V  [0201]  137.6,21.7 90 top
C103  100nF 25V  [0201]  171.48,38.63 0 top
C104  1uF 25V  [0402]  135.1,22.9 0 top
C106  1nF 25V  [0201]  172.2,53.6 90 top
C107  1nF 25V  [0201]  169.7,53.6 90 top
C108  1nF 25V  [0201]  167.1,53.6 90 top
C109  1nF 25V  [0201]  164.6,53.6 90 top
C110  1nF 25V  [0201]  187.6,53.6 90 top
C111  1nF 25V  [0201]  185.2,53.6 90 top
C112  1nF 25V  [0201]  182.5,53.5 90 top
C113  1nF 25V  [0201]  180,53.5 90 top
CS0  TP  [TP]  128.31,14.07 90 bottom
CS1  TP  [TP]  189.1,37.27 90 top
D1  MBRA340T3G  [SMA/DO-214AC]  33.98,59.47 90 top
D2  MBRA340T3G  [SMA/DO-214AC]  57.69,59.52 90 top
D3  MBRA340T3G  [SMA/DO-214AC]  81.29,59.04 90 top
D4  MBRA340T3G  [SMA/DO-214AC]  105.28,58.87 90 top
D5  MBRA340T3G  [SMA/DO-214AC]  129.06,59.09 90 top
D6  MBRA340T3G  [SMA/DO-214AC]  153,58.59 90 top
D7  MBRA340T3G  [SMA/DO-214AC]  177.93,60.08 90 top
D8  MBRA340T3G  [SMA/DO-214AC]  202.83,59.74 90 top
D9  1N4007  [SMA/DO-214AC]  32.68,29.31 270 top
D10  1N4007  [SMA/DO-214AC]  26.9,46.8 0 top
D11  US1J-E3/61T  [SMA/DO-214AC]  18.88,35.31 180 top
D12  1N4007  [SMA/DO-214AC]  48.28,46.91 0 top
D13  1N4007  [SMA/DO-214AC]  55.08,28.93 270 top
D14  US1J-E3/61T  [SMA/DO-214AC]  40.58,35.73 180 top
D15  SS12  [SMA/DO-214AC]  122.81,10.47 180 top
D16  SMAJ15A  [SMA/DO-214AC]  121.79,21.82 0 top
DAT  Blue  [LED-0603]  169.01,35.81 0 top
DSP  AFC11-S20ICC-00  [FPC20]  136.69,5.8 180 top
DVDD  TP  [TP]  165.9,18.21 0 top
ESD1  SP0503BAHTG  [SOT143]  175.22,13.75 90 top
ETH1  J1B1211CCD  [J1B1211CCD]  191.48,8.92 0 top
FAN  [02P]  127.22,31.47 90 top
FB-NI1  TP  [TP]  29.68,35.51 0 top
FB-NI2  TP  [TP]  52.08,35.43 0 top
GDGC  [1X4]  157.54,4.39 270 top
GND  TP  [TP]  128.34,19.13 180 top
GND-3  TP  [TP]  91.93,4.04 180 top
GND-5  TP  [TP]  108.86,3.85 0 top
IC1  MP2315GJ-Z  [SOT65P280X110-8N]  108.16,11.05 90 top
IC2  MP2315GJ-Z  [SOT65P280X110-8N]  91.43,11.24 90 top
IC3  ULN2803AFWG  [SO18]  135.81,31.05 90 top
IC4  MCP23017T-E/ML  [QFN28[6X6]ML]  148.45,31.95 135 top
IC5  MP150GJ  [SOT23-5]  48.08,40.23 90 top
IC6  HLW8032  [SO8]  13.16,85.72 270 top
IC7  HLW8032  [SO8]  108.4,85.73 270 top
IC8  HLW8032  [SO8]  37.2,85.84 270 top
IC9  SN74HC151PWR  [TSSOP16]  160.85,35.41 180 top
IC10  HLW8032  [SO8]  60.97,85.99 270 top
IC11  HLW8032  [SO8]  132.45,85.62 270 top
IC12  HLW8032  [SO8]  84.34,86.01 270 top
IC13  MP150GJ  [SOT23-5]  25.88,40.11 90 top
IC14  HLW8032  [SO8]  157.11,85.74 270 top
IC15  RP2040  [QFN56]  156.78,16.29 315 top
IC16  HLW8032  [SO8]  181.74,85.66 270 top
IC17  MCP6001RT-I/OT  [SOT23-5]  140.77,21.26 270 top
IC18  W25Q128JVPIQ  [SON127P600X500X75-8N]  163.45,25.13 0 top
IC19  CAT24C256HU4IGT3  [SON50P300X200X50-9T130X140N]  157.42,24.98 270 top
IC20  W5500  [LQFP48]  178.04,30.99 180 top
IC21  MIC5504-3.3YM5  [SOT23-5]  178.62,19.17 0 top
IC22  MCP6001RT-I/OT  [SOT23-5]  168.55,38.47 90 top
IOVDD  TP  [TP]  164.34,5.26 0 top
J2  JP  [SJ]  37.1,15.9 270 top
J7  JP  [SJ]  39.76,15.9 270 top
J8  0R 1%  [0805]  116.25,21.35 90 top
J9  0R 1%  [0805]  208.07,48.04 270 top
J10  0R 1%  [0805]  205.71,48.06 270 top
K1  G2RL-1A-E DC12  [RELAY_G2RL-1A-E_DC5_OMR]  24.92,73.4 180 top
K2  G2RL-1A-E DC12  [RELAY_G2RL-1A-E_DC5_OMR]  48.54,73.7 180 top
K3  G2RL-1A-E DC12  [RELAY_G2RL-1A-E_DC5_OMR]  72.17,73.8 180 top
K4  G2RL-1A-E DC12  [RELAY_G2RL-1A-E_DC5_OMR]  96.2,73.6 180 top
K5  G2RL-1A-E DC12  [RELAY_G2RL-1A-E_DC5_OMR]  120.02,73.15 180 top
K6  G2RL-1A-E DC12  [RELAY_G2RL-1A-E_DC5_OMR]  144.44,73.55 180 top
K7  G2RL-1A-E DC12  [RELAY_G2RL-1A-E_DC5_OMR]  169.07,73.35 180 top
K8  G2RL-1A-E DC12  [RELAY_G2RL-1A-E_DC5_OMR]  193.8,73.05 180 top
L1  4.9uH  [SRR5228A]  114.36,10.95 0 top
L2  4.2uH  [SRR5228A]  97.63,11.14 0 top
L3  1mH  [L-6.6X6.6]  25.88,29.61 0 top
L4  BLM18EG221TN1D  [0603]  183.23,25.58 90 top
L5  1mH  [L-6.6X6.6]  48.48,29.33 0 top
L-REC1  TP  [TP]  22.46,49.86 180 top
L-REC2  TP  [TP]  44.51,49.95 180 top
L_OUT1  MOUNT-PAD-ROUND2.8  [2,8-PAD]  24.77,91.69 90 top
L_OUT2  MOUNT-PAD-ROUND2.8  [2,8-PAD]  48.65,91.73 90 top
L_OUT3  MOUNT-PAD-ROUND2.8  [2,8-PAD]  71.73,91.77 90 top
L_OUT4  MOUNT-PAD-ROUND2.8  [2,8-PAD]  96.61,92.07 90 top
L_OUT5  MOUNT-PAD-ROUND2.8  [2,8-PAD]  119.99,91.57 90 top
L_OUT6  MOUNT-PAD-ROUND2.8  [2,8-PAD]  144.57,91.57 90 top
L_OUT7  MOUNT-PAD-ROUND2.8  [2,8-PAD]  168.95,91.57 90 top
L_OUT8  MOUNT-PAD-ROUND2.8  [2,8-PAD]  193.43,91.47 90 top
MISO0  TP  [TP]  130.29,14.07 90 bottom
MISO1  TP  [TP]  185.02,37.27 90 top
MOSI0  TP  [TP]  124.35,14.07 90 bottom
MOSI1  TP  [TP]  187.06,37.27 90 top
N_OUT1  MOUNT-PAD-ROUND2.8  [2,8-PAD]  24.66,100.42 90 top
N_OUT2  MOUNT-PAD-ROUND2.8  [2,8-PAD]  48.57,100.37 90 top
N_OUT3  MOUNT-PAD-ROUND2.8  [2,8-PAD]  71.81,100.41 90 top
N_OUT4  MOUNT-PAD-ROUND2.8  [2,8-PAD]  96.45,100.4 90 top
N_OUT5  MOUNT-PAD-ROUND2.8  [2,8-PAD]  120.07,100.32 90 top
N_OUT6  MOUNT-PAD-ROUND2.8  [2,8-PAD]  144.41,100.35 90 top
N_OUT7  MOUNT-PAD-ROUND2.8  [2,8-PAD]  168.86,100.3 90 top
N_OUT8  MOUNT-PAD-ROUND2.8  [2,8-PAD]  193.27,100.32 90 top
OPT1  ACPL-247-500E  [SO16]  168.65,48.15 180 top
OPT2  ACPL-247-500E  [SO16]  184.1,48 180 top
P3ON  Green  [LED-0603]  81.56,19.86 0 top
P5ON  Green  [LED-0603]  81.56,17.82 0 top
P12ON  Green  [LED-0603]  81.56,15.67 0 top
PROC  Green  [LED-0603]  168.6,1.8 90 top
PWR  Green  [LED-0603]  153,40.58 0 top
R1  DNI  [0402]  102.1,8.3 180 top
R2  10K 1%  [0402]  87.15,8.59 180 top
R3  100K 1%  [0402]  103.86,9.65 0 top
R4  9.09K 1%  [0402]  105.96,10.35 90 top
R5  100K 1%  [0402]  87.13,9.94 0 top
R6  7.5K 1%  [0402]  89.23,10.54 90 top
R7  10R 1%  [0402]  110.76,12.95 270 top
R8  20K 1%  [0402]  105.96,13.45 90 top
R9  10R 1%  [0402]  94.03,13.14 270 top
R10  33K  [0402]  89.23,13.64 90 top
R11  40.2K 1%  [0402]  105.96,16.55 270 top
R12  7.5K 1%  [0402]  104.76,13.45 270 top
R13  40.2K 1%  [0402]  89.23,16.74 270 top
R14  12.7K 1%  [0402]  88.03,13.64 270 top
R15  27R 1%  [0201]  162.69,20.02 225 top
R16  1K 1%  [0201]  149.34,10.17 0 top
R17  330R 1% 1W  [2512]  161.01,47.96 90 top
R18  330R 1% 1W  [2512]  156.52,47.91 90 top
R19  330R 1% 1W  [2512]  151.84,47.93 90 top
R20  330R 1% 1W  [2512]  147.24,47.93 90 top
R21  330R 1% 1W  [2512]  142.64,47.93 90 top
R22  330R 1% 1W  [2512]  138.04,47.93 90 top
R23  330R 1% 1W  [2512]  133.44,47.93 90 top
R24  330R 1% 1W  [2512]  128.84,47.93 90 top
R25  0.002R 1%  [2512]  15.26,100.54 0 bottom
R26  0.002R 1%  [2512]  110.21,100.57 0 bottom
R27  0.002R 1%  [2512]  134.46,100.67 0 bottom
R28  0.002R 1%  [2512]  159.42,100.59 0 bottom
R29  0.002R 1%  [2512]  184.16,100.44 0 bottom
R30  0.002R 1%  [2512]  86.46,100.72 0 bottom
R31  0.002R 1%  [2512]  62.31,100.77 0 bottom
R32  0.002R 1%  [2512]  38.56,100.67 0 bottom
R33  1K 1%  [0805]  13.38,96.18 270 top
R34  1K 1%  [0805]  17.14,96.18 270 top
R35  0.002R 1%  [2512]  15.27,100.51 180 top
R36  470K 1%  [0805]  16.25,81.84 0 top
R37  470K 1%  [0805]  16.22,79.71 180 top
R38  470K 1%  [0805]  16.23,77.4 180 top
R39  470K 1%  [0805]  12,77.52 180 top
R40  1K 1%  [0805]  12.03,79.77 0 top
R41  1K 1%  [0805]  107.98,96.4 270 top
R42  1K 1%  [0805]  112.24,96.38 270 top
R43  0.002R 1%  [2512]  110.21,100.54 180 top
R44  470K 1%  [0805]  111.38,81.7 180 top
R45  470K 1%  [0805]  111.42,79.66 180 top
R46  470K 1%  [0805]  111.38,77.48 180 top
R47  470K 1%  [0805]  107.36,77.5 180 top
R48  1K 1%  [0805]  107.38,79.62 0 top
R49  1K 1%  [0805]  36.68,96.38 270 top
R50  1K 1%  [0805]  40.44,96.38 270 top
R51  0.002R 1%  [2512]  38.56,100.64 180 top
R52  470K 1%  [0805]  39.98,82.1 180 top
R53  470K 1%  [0805]  40.02,79.96 180 top
R54  470K 1%  [0805]  40.03,77.93 180 top
R55  470K 1%  [0805]  35.94,77.9 180 top
R56  1K 1%  [0805]  35.94,82.12 0 top
R57  0R 1%  [0402]  156.33,40.49 270 top
R58  DNI  [0402]  157.43,40.49 270 top
R59  1K 1%  [0201]  171.5,53.6 270 top
R60  4.99K 1%  [0603]  30.58,41.11 90 top
R61  4.99K 1%  [0603]  29.78,38.51 180 top
R62  39R 1% 2W  [2512]  33.07,48.95 270 top
R63  1K 1%  [_0603X4-1206]  176.05,53.95 90 top
R64  1K 1%  [_0603X4-1206]  191.95,54.15 90 top
R65  1K 1%  [0805]  60.38,96.48 270 top
R66  1K 1%  [0805]  64.14,96.48 270 top
R67  0.002R 1%  [2512]  62.31,100.74 180 top
R68  470K 1%  [0805]  63.48,82.1 180 top
R69  470K 1%  [0805]  63.49,79.99 180 top
R70  470K 1%  [0805]  63.48,77.88 180 top
R71  470K 1%  [0805]  59.46,77.9 180 top
R72  1K 1%  [0805]  59.48,80.02 0 top
R73  1K 1%  [0805]  132.2,96.43 270 top
R74  1K 1%  [0805]  136.54,96.48 270 top
R75  0.002R 1%  [2512]  134.46,100.64 180 top
R76  470K 1%  [0805]  135.78,81.7 180 top
R77  470K 1%  [0805]  135.72,79.56 180 top
R78  470K 1%  [0805]  135.68,77.48 180 top
R79  470K 1%  [0805]  131.66,77.5 180 top
R80  1K 1%  [0805]  131.68,79.62 0 top
R81  1K 1%  [0805]  84.1,96.27 270 top
R82  1K 1%  [0805]  88.44,96.28 270 top
R83  0.002R 1%  [2512]  86.46,100.69 180 top
R84  470K 1%  [0805]  87.48,81.9 180 top
R85  470K 1%  [0805]  87.52,79.76 180 top
R86  470K 1%  [0805]  87.58,77.68 180 top
R87  470K 1%  [0805]  83.46,77.7 180 top
R88  1K 1%  [0805]  83.38,79.82 0 top
R89  10K 1%  [_0603X4-1206]  156.25,35.51 90 top
R90  10K 1%  [_0603X4-1206]  161.45,29.51 180 top
R91  0R 1%  [0402]  160.55,41.21 90 top
R92  DNI  [0402]  159.35,41.21 90 top
R93  10K 1%  [_0603X4-1206]  145.25,23.71 180 top
R94  100K 1%  [0402]  119.28,19.24 180 top
R95  10K 1%  [0402]  122.68,19.24 180 top
R96  10K 1%  [0805]  15.18,31.81 0 top
R97  1K 1%  [0805]  157.3,96.4 270 top
R98  1K 1%  [0805]  161.34,96.4 270 top
R99  0.002R 1%  [2512]  159.42,100.56 180 top
R100  470K 1%  [0805]  160.4,81.9 180 top
R101  470K 1%  [0805]  160.4,79.76 180 top
R102  470K 1%  [0805]  160.4,77.68 180 top
R103  470K 1%  [0805]  156.24,77.7 180 top
R104  1K 1%  [0805]  156.26,79.82 0 top
R105  4.99K 1%  [0603]  52.18,38.53 180 top
R106  39R 1% 2W  [2512]  54.03,48.98 270 top
R107  4.99K 1%  [0603]  53.08,41.33 90 top
R108  10K 1%  [0805]  37.48,30.93 0 top
R109  4.7K 1%  [0201]  139.46,18 0 top
R110  1M 1%  [1206]  201.4,31.3 0 top
R111  DNI  [R0201]  158.94,28.56 90 top
R112  1K 1%  [0402]  193.66,42.6 180 top
R113  1K 1%  [0805]  181.39,96.1 270 top
R114  1K 1%  [0805]  186.14,96.1 270 top
R115  0.002R 1%  [2512]  184.16,100.41 180 top
R116  470K 1%  [0805]  185.1,81.8 180 top
R117  470K 1%  [0805]  185.1,79.66 180 top
R118  470K 1%  [0805]  185.1,77.48 180 top
R119  470K 1%  [0805]  180.94,77.5 180 top
R120  1K 1%  [0805]  180.96,79.62 0 top
R121  2.2K 1%  [0201]  178.31,8.66 0 top
R122  1K 1%  [0402]  171.32,36.59 270 top
R123  1K 1%  [0402]  82.73,4.39 90 top
R124  5.1K 1%  [0201]  176.72,8.12 90 top
R125  5.1K 1%  [0201]  173.74,8.54 90 top
R126  10K 1%  [0201]  169.74,15.08 270 top
R127  10K 1%  [0201]  169.73,13.78 270 top
R128  NC  [R0201]  158.17,27.64 90 top
R129  4.7K 1%  [0201]  157.02,27.36 0 top
R130  3.3K 1%  [_0603X4-1206]  154,25.58 0 top
R131  1M 1%  [0402]  169.23,6.75 90 top
R132  10K 1%  [0402]  193.75,37.81 0 top
R133  3.3R 1%  [0201]  186.9,28.66 0 top
R134  3.3R 1%  [0201]  186.91,27.9 0 top
R135  3.3R 1%  [0201]  185.6,31.6 0 top
R136  3.3R 1%  [0201]  185.61,30.87 0 top
R137  49.9R 1%  [0201]  185.61,30.14 0 top
R138  49.9R 1%  [0201]  185.6,32.33 0 top
R139  49.9R 1%  [0201]  185.6,29.4 180 top
R140  49.9R 1%  [0201]  185.62,27.17 180 top
R141  470R 1%  [0402]  197.46,21.56 270 top
R142  470R 1%  [0402]  185.66,21.45 270 top
R143  12.4K 1%  [R0201]  182.77,34.66 180 top
R144  1M 1%  [0201]  171.3,30.98 270 top
R145  4.7K 1%  [0201]  174.26,26.23 270 top
R146  470R 1%  [0402]  186.96,24.58 90 top
R147  10K 1%  [0402]  164.01,9.21 270 top
R148  2.4K 1%  [0402]  102.62,19.22 180 top
R149  3.3K 1%  [_0603X4-1206]  130.31,13.35 270 top
R150  8.2K 1%  [0402]  111.46,20.24 180 top
R151  1K 1%  [0402]  152.88,39.06 180 top
R152  10R 1%  [0201]  136.5,21.4 0 top
R153  1K 1%  [0201]  169,53.6 270 top
R154  1K 1%  [0201]  166.4,53.6 270 top
R155  1K 1%  [0201]  163.9,53.6 270 top
R156  1K 1%  [0201]  186.9,53.6 270 top
R157  1K 1%  [0201]  184.5,53.6 270 top
R158  1K 1%  [0201]  181.8,53.5 270 top
R159  1K 1%  [0201]  179.3,53.5 270 top
R160  27R 1%  [0201]  162.19,20.52 225 top
R161  DNI  [0402]  109.5,15.1 270 top
R162  10K 1%  [0402]  105.1,8.3 0 top
R163  1K 1%  [0402]  167.26,13.17 135 top
R164  10K 1%  [0402]  126.13,24.99 90 top
R165  NC  [R0201]  130.72,23.08 0 top
REF1  LM4040B30FTA  [SOT23]  136.97,17.76 180 top
REL0  TP  [TP]  147.38,40.1 90 bottom
REL1  TP  [TP]  145.44,40.12 90 bottom
REL2  TP  [TP]  143.41,40.19 90 bottom
REL3  TP  [TP]  141.41,40.16 90 bottom
REL4  TP  [TP]  139.48,40.22 270 bottom
REL5  TP  [TP]  137.39,40.22 90 bottom
REL6  TP  [TP]  135.29,40.32 90 bottom
REL7  TP  [TP]  133.09,40.41 90 bottom
RESET  B3U-1000P  [B3U-1000P]  199.88,37.76 180 top
RGTG  [1X4]  205.27,24.44 180 top
RX0  TP  [TP]  148.15,38.44 90 top
RX1  TP  [TP]  150.12,38.42 90 top
SCL0  TP  [TP]  132.69,18.15 180 top
SCL1  TP  [TP]  150.12,12.55 90 top
SCLK0  TP  [TP]  126.33,14.07 90 bottom
SCLK1  TP  [TP]  182.98,37.27 90 top
SDA0  TP  [TP]  132.69,16.17 180 top
SDA1  TP  [TP]  148.14,12.55 90 top
SW  TP  [TP]  118.11,12.76 270 top
SW3  TP  [TP]  98.13,17.04 180 top
T1  [SOT23]  128.33,25.7 0 top
U$1  [ESD_10.00]  102.6,70.42 0 bottom
U$2  [ESD_10.00]  6.24,61.6 0 top
U$3  [3,2]  205.47,103.26 0 top
U$4  [3,2]  4.77,103.26 0 top
U$5  [DMT]  19.4,15.2 0 top
U$6  [3,2]  4.6,6.5 0 top
U$7  [DMT]  137.9,30 0 bottom
U$10  [OSHW-LOGO-M]  121.87,5.05 0 top
U$11  [ROHS_LOGO_0.18_IN]  143.62,37.5 0 top
USB1  USB-TYPE-C-018  [USB-C]  175.15,2.41 0 top
VBUS  TP  [TP]  168.08,15.36 180 top
VNI1  TP  [TP]  27.18,35.01 90 top
VNI2  TP  [TP]  49.38,35.03 270 top
VREF  TP  [TP]  141.78,18.33 0 top
X1  ABM8-272-T3 12MHz  [WE-XTAL_CFPX-180]  148.5,7.38 0 top
X2  25MHz  [WE-XTAL_CFPX-180]  169.1,30.97 90 top

## Library data of the parts
3VDC 3VFB 5V-NI1 5V-NI2 5VDC 5VFB 12VDC AVDD C83 CS0 CS1 DVDD FB-NI1 FB-NI2 GND GND-3 GND-5 IOVDD L1 L2 L-REC1 L-REC2 MISO0 MISO1 MOSI0 MOSI1 R1 R10 R58 R92 R111 R128 R143 R161 R165 REL0 REL1-REL7 RX0 RX1 SCL0 SCL1 SCLK0 SCLK1 SDA0 SDA1 SW SW3 VBUS VNI1 VNI2 VREF = ds_passive
AC/DC1 = ds_trafo; DATASHEET: https://www.meanwell.com/Upload/PDF/IRM-10/IRM-10-SPEC.PDF; DESCRIPTION: - Power supply module,Power Supplies ROHS; LCSC_PART: C20618065
AC/DC2 = ds_trafo; DATASHEET: https://www.meanwell.com/Upload/PDF/IRM-15/IRM-15-SPEC.PDF; DESCRIPTION: 15W AC-DC PCB-Mount Green Power Module; LCSC_PART: C5439799
AC_L AC_N L_OUT1-L_OUT8 N_OUT1-N_OUT8 U$3 U$4 U$6 = holes
BOOT RESET = ds_passive; DATASHEET: https://omronfs.omron.com/en_US/ecb/products/pdf/en-b3u.pdf; DESCRIPTION: 2.5mm 1.6mm Round Button 50mA Standing paste 3mm SPST 153gf 12V SMD,2.5x3mm Tactile Switches ROHS; LCSC_PART: C231329
C1 C2 C14 C15 C17 C18 = ds_capacitors; DESCRIPTION: 25V 22uF X5R ±10% 1206 Multilayer Ceramic Capacitors MLCC - SMD/SMT ROHS; LCSC_PART: C12891
C3 C4 C6-C9 C19 C20 C33 C34 C66 C79 = ds_capacitors; DESCRIPTION: 25V 100nF X7R ±10% 0402 Multilayer Ceramic Capacitors MLCC - SMD/SMT ROHS; LCSC_PART: C56392
C5 C51 = ds_capacitors; DESCRIPTION: 50V 1nF X7R ±10% 0603 Multilayer Ceramic Capacitors MLCC - SMD/SMT ROHS; LCSC_PART: C1588
C10 C13 C16 = ds_capacitors; DESCRIPTION: 100uF 25V 90mA@120Hz ±20% SMD,D6.3xL7.7mm Aluminum Electrolytic Capacitors - SMD ROHS; LCSC_PART: C267469
C11 C12 = ds_capacitors; DESCRIPTION: 50V 33pF NP0 ±5% 0402 Multilayer Ceramic Capacitors MLCC - SMD/SMT ROHS; LCSC_PART: C107005
C21 C46 = ds_capacitors; DESCRIPTION: 50V 2.2uF X5R ±10% 0603 Multilayer Ceramic Capacitors MLCC - SMD/SMT ROHS; LCSC_PART: C913904
C22 C52 = ds_capacitors; DESCRIPTION: 50V 220nF X7R ±10% 0805 Multilayer Ceramic Capacitors MLCC - SMD/SMT ROHS; LCSC_PART: C5378
C23 C53 = ds_capacitors; DESCRIPTION: 100uF 50V 229mA@120Hz ±20% SMD,D6.3xL7.7mm Aluminum Electrolytic Capacitors - SMD ROHS; LCSC_PART: C3151829
C24-C32 C36-C44 C48-C50 C54-C56 = ds_capacitors; DESCRIPTION: 50V 33nF X7R ±10% 0805 Multilayer Ceramic Capacitors MLCC - SMD/SMT ROHS; LCSC_PART: C107150
C35 C47 = ds_capacitors; DESCRIPTION: 2.2uF 400V 28mA@120Hz ±20% SMD,D6.3xL10mm Aluminum Electrolytic Capacitors - SMD ROHS; LCSC_PART: C3345109
C45 C57 = ds_capacitors; DESCRIPTION: 50V 1uF X7R ±10% 0805 Multilayer Ceramic Capacitors MLCC - SMD/SMT ROHS; LCSC_PART: C28323
C58 C59 = ds_capacitors; DESCRIPTION: 50V 15pF C0G ±5% 0201 Multilayer Ceramic Capacitors MLCC - SMD/SMT ROHS; LCSC_PART: C22374851
C60 C104 = ds_capacitors; DESCRIPTION: 25V 1uF X5R ±10% 0402 Multilayer Ceramic Capacitors MLCC - SMD/SMT ROHS; LCSC_PART: C52923
C61-C64 C67-C77 C84 C88-C96 C98 C100 C101 C103 = ds_capacitors; DESCRIPTION: 25V 100nF X5R ±10% 0201 Multilayer Ceramic Capacitors MLCC - SMD/SMT ROHS; LCSC_PART: C76939
C65 C97 C99 = ds_capacitors; DESCRIPTION: 50V 10uF X5R ±10% 0805 Multilayer Ceramic Capacitors MLCC - SMD/SMT ROHS; LCSC_PART: C440198
C78 = ds_capacitors; DESCRIPTION: 50V 4.7nF X7R ±10% 0402 Multilayer Ceramic Capacitors MLCC - SMD/SMT ROHS; LCSC_PART: C1538
C80 = ds_capacitors; DESCRIPTION: 50V 22nF X7R ±10% 0402 Multilayer Ceramic Capacitors MLCC - SMD/SMT ROHS; LCSC_PART: C1532
C81 C82 = ds_capacitors; DESCRIPTION: 50V 6.8nF X7R ±10% 0201 Multilayer Ceramic Capacitors MLCC - SMD/SMT ROHS; LCSC_PART: C285015
C85 = ds_capacitors; DESCRIPTION: 25V 4.7uF X5R ±20% 0402 Multilayer Ceramic Capacitors MLCC - SMD/SMT ROHS; LCSC_PART: C22367824
C86 C87 = ds_capacitors; DESCRIPTION: 50V 18pF C0G ±5% 0201 Multilayer Ceramic Capacitors MLCC - SMD/SMT ROHS; LCSC_PART: C62164
C102 = ds_capacitors; DESCRIPTION: 16V 1uF X5R ±20% 0201 Multilayer Ceramic Capacitors MLCC - SMD/SMT ROHS; LCSC_PART: C307385
C106-C113 = ds_capacitors; DESCRIPTION: 25V 1nF X7R ±10% 0201 Multilayer Ceramic Capacitors MLCC - SMD/SMT ROHS; LCSC_PART: C7694325V
D1-D8 = ds_diode; DATASHEET: https://www.onsemi.com/download/data-sheet/pdf/mbra340t3-d.pdf; DESCRIPTION: 40V 450mV@3A 3A SMA(DO-214AC) Schottky Diodes ROHS; LCSC_PART: C26178
D9 D10 D12 D13 = ds_diode; DATASHEET: https://www.sycelectronica.com.ar/semiconductores/1N4007-SMD.pdf?srsltid=AfmBOorCHiPwFTsNfQbBfqAoh5UjZ4nVNdjXugiEGIgvQSRi56Ew2-9Q; DESCRIPTION: 1A Independent Type 1kV 1.1V@1A SMA(DO-214AC) Diodes - General Purpose ROHS; LCSC_PART: C727081
D11 D14 = ds_diode; DATASHEET: https://www.vishay.com/docs/88768/us1_test_dcicons.pdf; DESCRIPTION: 1.7V@1A 1A 600V SMA(DO-214AC) Fast Recovery / High Efficiency Diodes ROHS; LCSC_PART: C44763
D15 = ds_diode; DATASHEET: https://www.vishay.com/docs/88746/ss12.pdf; DESCRIPTION: 20V Independent Type 450mV@1A 1A SMA(DO-214AC) Schottky Diodes ROHS; LCSC_PART: C727049
D16 = ds_diode; DATASHEET: https://www.littelfuse.com/assetdocs/littelfuse_tvs_diode_smbj_datasheet.pdf?assetguid=09a6ae9a-73cb-4ac4-acac-e6dab92ab953; DESCRIPTION: 16.4A 24.4V 16.7V 15V SMA(DO-214AC) ESD and Surge Protection (TVS/ESD) ROHS; LCSC_PART: C23424
DAT = ds_LED; DESCRIPTION: 20mA 240mcd Colorless and transparent -20℃~+85℃ Positive Stick 455nm~475nm Blue 120° 70mW 3.3V 0603 LED Indication - Discrete ROHS; LCSC_PART: C965807
DSP = ds_con; DESCRIPTION: Drawer Type 20P Single-sided contact points/Vertical Standing paste 0.5mm SMD,P=0.5mm FFC, FPC (Flat Flexible) Connector Assemblies ROHS; LCSC_PART: C11073
ESD1 = ds_ic_peripherals; DESCRIPTION: SOT-143 ESD and Surge Protection (TVS/ESD) ROHS; LCSC_PART: C3040626
ETH1 = ds_con; DATASHEET: file:///C:/Users/sdvid/Downloads/j1b1211ccd.pdf; DESCRIPTION: RJ45Receptacle 1 Shielded Bend insert cat5 Gold Phosphor Bronze WithLED -40℃~+85℃ Plugin Ethernet Connectors / Modular Connectors (RJ45 RJ11) ROHS; LCSC_PART: C910371
FAN = con-amp-quick; OC_FARNELL: unknown; OC_NEWARK: unknown
GDGC RGTG = ds_con
IC1 IC2 = ds_ic_vreg; DATASHEET: https://www.monolithicpower.com/en/documentview/productdocument/index/version/2/document_type/Datasheet/lang/EN/sku/MP2315S?srsltid=AfmBOoqbTpEIx6KSoiWl4ZUQnKkVQGj573Ur79inB-ZmXjzR-CZxOYOr; DESCRIPTION: Step-down type Adjustable 800mV~22.8V 3A 4.5V~24V TSOT-23-8 DC-DC Converters ROHS; LCSC_PART: C45889
IC3 = ds_ic_peripherals; DATASHEET: https://www.sycelectronica.com.ar/semiconductores/ULN2803-SMD.pdf?srsltid=AfmBOophiuKj-Ssp-X9zHCj-smbNohAULqg7ZzMWt7RSG8XB10-82Tty; DESCRIPTION: SOP-18-300mil Darlington Transistor Arrays ROHS; LCSC_PART: C845537
IC4 = ds_ic_peripherals; DATASHEET: https://ww1.microchip.com/downloads/en/devicedoc/20001952c.pdf; DESCRIPTION: 1.7MHz I2C QFN-28-EP(6x6) I/O Expanders ROHS; LCSC_PART: C629439
IC5 IC13 = ds_ic_vreg; MP150: MP150GJ
IC6-IC8 IC10-IC12 IC14 IC16 = ds_ic_peripherals; DATASHEET: https://w2.electrodragon.com/Chip-cn-dat/HLW-dat/HLW8032-dat/HLW8032.pdf; DESCRIPTION: SOP-8 Energy Metering ROHS; LCSC_PART: C128023
IC9 = ds_ic_logic; DATASHEET: https://www.ti.com/lit/ds/symlink/sn74hc151.pdf?ts=1749408396579&ref_url=https%253A%252F%252Fwww.google.com%252F; DESCRIPTION: 7.8mA 2V~6V 7.8mA TSSOP-16 Signal Switches, Multiplexers, Decoders ROHS; LCSC_PART: C2653837
IC15 = ds_ic_mcu; DESCRIPTION: 133MHz LQFN-56(7x7) Microcontrollers (MCU/MPU/SOC) ROHS; LCSC_PART: C2040
IC17 IC22 = ds_ic_opa; DESCRIPTION: Single 1pA 0.6V/us 1MHz SOT-23-5 Operational Amplifier ROHS; LCSC_PART: C154973
IC18 = ds_ic_memory; DATASHEET: https://www.nikom.biz/pdf/A089014.pdf?srsltid=AfmBOopZgx1G_qpdWEIfoO5Ne0YuvaGR9ub92ZA1x90R1kz9P6rrUXmf; DESCRIPTION: 128Mbit WSON-8-EP(5x6) NOR FLASH ROHS; LCSC_PART: C190862
IC19 = ds_ic_memory; DATASHEET: https://www.onsemi.com/download/data-sheet/pdf/cat24c256-d.pdf; DESCRIPTION: 256Kbit I2C UDFN-8(2x3) EEPROM ROHS; LCSC_PART: C233771
IC20 = ds_ic_peripherals; DATASHEET: https://docs.wiznet.io/img/products/w5500/W5500_ds_v110e.pdf; DESCRIPTION: Ethernet Controllers ROHS; LCSC_PART: C32843
IC21 = ds_ic_vreg; DATASHEET: https://ww1.microchip.com/downloads/en/DeviceDoc/MIC5501-02-03-04-300mA-Single-Output-LDO-in-Small-Packages-DS20006006B.pdf; DESCRIPTION: SOT-23-5 Voltage Regulators - Linear, Low Drop Out (LDO) Regulators ROHS; LCSC_PART: C41348078
J2 J7 = jumper
J8-J10 = ds_resistor; DESCRIPTION: 125mW Thick Film Resistors 150V ±800ppm/℃ ±1% 0Ω 0805 Chip Resistor - Surface Mount ROHS; LCSC_PART: C17477
K1-K8 = ds_passive; DESCRIPTION: 12V 16A One Normally Open: 1A (SPST-NO) DIP,12.5x28.8mm Power Relays ROHS; LCSC_PART: C1564126
L3 L5 = ds_inductor; DESCRIPTION: 260mA 1mH ±20% 220mA SMD,6x6mm Power Inductors ROHS; LCSC_PART: C168049
L4 = ds_inductor; DESCRIPTION: 150mΩ ±25% 220Ω@100MHz 0603 Ferrite Beads ROHS; LCSC_PART: C113025
OPT1 OPT2 = ds_ic_peripherals; DATASHEET: https://docs.broadcom.com/doc/AV02-0752EN; DESCRIPTION: 80V 50mA 400mV@2.4mA,8mA 4 6V 1.2V DC SOP-16-4.4mm Transistor, Photovoltaic Output Optoisolators ROHS; LCSC_PART: C188681
P3ON P5ON P12ON PROC PWR = ds_LED; DESCRIPTION: 20mA 810mcd Colorless and transparent Individual diode 515nm~535nm -20℃~+85℃ Positive Stick Emerald 120° 70mW 3.3V 0603 LED Indication - Discrete ROHS; LCSC_PART: C965804
R2 R95 R132 R147 R162 R164 = ds_resistor; DESCRIPTION: 62.5mW Thick Film Resistors 50V ±100ppm/℃ ±1% 10kΩ 0402 Chip Resistor - Surface Mount ROHS; LCSC_PART: C25744
R3 R5 R94 = ds_resistor; DESCRIPTION: 62.5mW Thick Film Resistors 50V ±100ppm/℃ ±1% 100kΩ 0402 Chip Resistor - Surface Mount ROHS; LCSC_PART: C25741
R4 = ds_resistor; DESCRIPTION: 62.5mW Thick Film Resistors 50V ±100ppm/℃ ±1% 9.09kΩ 0402 Chip Resistor - Surface Mount ROHS; LCSC_PART: C11549
R6 R12 = ds_resistor; DESCRIPTION: 62.5mW Thick Film Resistors 50V ±100ppm/℃ ±1% 7.5kΩ 0402 Chip Resistor - Surface Mount ROHS; LCSC_PART: C25918
R7 R9 = ds_resistor; DESCRIPTION: 62.5mW Thick Film Resistors 50V ±1% ±200ppm/℃ 10Ω 0402 Chip Resistor - Surface Mount ROHS; LCSC_PART: C25077
R8 = ds_resistor; DESCRIPTION: 62.5mW Thick Film Resistors 50V ±100ppm/℃ ±1% 20kΩ 0402 Chip Resistor - Surface Mount ROHS; LCSC_PART: C25765
R11 R13 = ds_resistor; DESCRIPTION: 62.5mW Thick Film Resistors 50V ±100ppm/℃ ±1% 40.2kΩ 0402 Chip Resistor - Surface Mount ROHS; LCSC_PART: C25893
R14 = ds_resistor; DESCRIPTION: 62.5mW Thick Film Resistors 50V ±100ppm/℃ ±1% 12.7kΩ 0402 Chip Resistor - Surface Mount ROHS; LCSC_PART: C25853
R15 R160 = ds_resistor; DESCRIPTION: 50mW Thick Film Resistors 25V ±1% ±200ppm/℃ 27Ω 0201 Chip Resistor - Surface Mount ROHS; LCSC_PART: C473051
R16 R59 R153-R159 = ds_resistor; DESCRIPTION: 50mW Thick Film Resistors 25V ±1% ±200ppm/℃ 1kΩ 0201 Chip Resistor - Surface Mount ROHS; LCSC_PART: C270365
R17-R24 = ds_resistor; DESCRIPTION: 1W Thick Film Resistors 200V ±100ppm/℃ ±1% 330Ω 2512 Chip Resistor - Surface Mount ROHS; LCSC_PART: C620880
R25-R32 R35 R43 R51 R67 R75 R83 R99 R115 = ds_resistor; DESCRIPTION: 3W ±100ppm/℃ ±1% 2mΩ 2512 Chip Resistor - Surface Mount ROHS; LCSC_PART: C728320
R33 R34 R40-R42 R48-R50 R56 R65 R66 R72-R74 R80-R82 R88 R97 R98 R104 R113 R114 R120 = ds_resistor; DESCRIPTION: 125mW Thick Film Resistors 150V ±100ppm/℃ ±1% 1kΩ 0805 Chip Resistor - Surface Mount ROHS; LCSC_PART: C17513
R36-R39 R44-R47 R52-R55 R68-R71 R76-R79 R84-R87 R100-R103 R116-R119 = ds_resistor; DESCRIPTION: 125mW Thick Film Resistors 150V ±100ppm/℃ ±1% 470kΩ 0805 Chip Resistor - Surface Mount ROHS; LCSC_PART: C17709
R57 R91 = ds_resistor; DESCRIPTION: 62.5mW Thick Film Resistors 50V ±800ppm/℃ ±1% 0Ω 0402 Chip Resistor - Surface Mount ROHS; LCSC_PART: C17168
R60 R61 R105 R107 = ds_resistor; DESCRIPTION: 100mW Thick Film Resistors 75V ±100ppm/℃ ±1% 4.99kΩ 0603 Chip Resistor - Surface Mount ROHS; LCSC_PART: C23046
R62 R106 = ds_resistor; DESCRIPTION: 2W Thick Film Resistors 200V ±100ppm/℃ ±1% 39Ω 2512 Chip Resistor - Surface Mount ROHS; LCSC_PART: C175263
R63 R64 = ds_resistor; DESCRIPTION: 4 ±1% 1kΩ 62.5mW ±200ppm/℃ 0603x4 Resistor Networks, Arrays ROHS; LCSC_PART: C110021
R89 R90 R93 = ds_resistor; DESCRIPTION: 4 ±1% 10kΩ 62.5mW ±200ppm/℃ 0603x4 Resistor Networks, Arrays ROHS; LCSC_PART: C110924
R96 R108 = ds_resistor; DESCRIPTION: 125mW Thick Film Resistors 150V ±100ppm/℃ ±1% 10kΩ 0805 Chip Resistor - Surface Mount ROHS; LCSC_PART: C17414
R109 R129 R145 = ds_resistor; DESCRIPTION: 50mW Thick Film Resistors 25V ±1% ±200ppm/℃ 4.7kΩ 0201 Chip Resistor - Surface Mount ROHS; LCSC_PART: C270346
R110 = ds_resistor; DESCRIPTION: 250mW Thick Film Resistors 200V ±100ppm/℃ ±1% 1MΩ 1206 Chip Resistor - Surface Mount ROHS; LCSC_PART: C17927
R112 R122 R123 R151 R163 = ds_resistor; DESCRIPTION: 62.5mW Thick Film Resistors 50V ±100ppm/℃ ±1% 1kΩ 0402 Chip Resistor - Surface Mount ROHS; LCSC_PART: C11702
R121 = ds_resistor; DESCRIPTION: 50mW Thick Film Resistors 25V ±1% ±200ppm/℃ 2.2kΩ 0201 Chip Resistor - Surface Mount ROHS; LCSC_PART: C473508
R124 R125 = ds_resistor; DESCRIPTION: 50mW Thick Film Resistors 25V ±1% ±200ppm/℃ 5.1kΩ 0201 Chip Resistor - Surface Mount ROHS; LCSC_PART: C274341
R126 R127 = ds_resistor; DESCRIPTION: 50mW Thick Film Resistors 25V ±1% ±200ppm/℃ 10kΩ 0201 Chip Resistor - Surface Mount ROHS; LCSC_PART: C473048
R130 R149 = ds_resistor; DESCRIPTION: 4 ±1% 3.3kΩ 62.5mW ±200ppm/℃ 0603x4 Resistor Networks, Arrays ROHS; LCSC_PART: C1734380
R131 = ds_resistor; DESCRIPTION: 62.5mW Thick Film Resistors 50V ±100ppm/℃ ±1% 1MΩ 0402 Chip Resistor - Surface Mount ROHS; LCSC_PART: C26083
R133-R136 = ds_resistor; DESCRIPTION: 50mW Thick Film Resistors 25V -200ppm/℃~+400ppm/℃ ±1% 3.3Ω 0201 Chip Resistor - Surface Mount ROHS; LCSC_PART: C158547
R137-R140 = ds_resistor; DESCRIPTION: 50mW Thick Film Resistors 25V ±1% ±200ppm/℃ 49.9Ω 0201 Chip Resistor - Surface Mount ROHS; LCSC_PART: C155744
R141 R142 R146 = ds_resistor; DESCRIPTION: 62.5mW Thick Film Resistors 50V ±100ppm/℃ ±1% 470Ω 0402 Chip Resistor - Surface Mount ROHS; LCSC_PART: C25117
R144 = ds_resistor; DESCRIPTION: 50mW Thick Film Resistors 25V ±1% ±200ppm/℃ 1MΩ 0201 Chip Resistor - Surface Mount ROHS; LCSC_PART: C295786
R148 = ds_resistor; DESCRIPTION: 62.5mW Thick Film Resistors 50V ±100ppm/℃ ±1% 2.4kΩ 0402 Chip Resistor - Surface Mount ROHS; LCSC_PART: C25882
R150 = ds_resistor; DESCRIPTION: 62.5mW Thick Film Resistors 50V ±100ppm/℃ ±1% 8.2kΩ 0402 Chip Resistor - Surface Mount ROHS; LCSC_PART: C25924
R152 = ds_resistor; DESCRIPTION: 50mW Thick Film Resistors 25V ±1% ±200ppm/℃ 10Ω 0201 Chip Resistor - Surface Mount ROHS; LCSC_PART: C270817
REF1 = ds_ic_vreg; DESCRIPTION: 3V ±0.2% 15mA Fixed SOT-23 Voltage Reference ROHS; LCSC_PART: C460604
T1 = ds_active
U$1 U$2 = logo
U$5 U$7 = ds_silkscreen
U$10 U$11 = SparkFun-Aesthetics
USB1 = ds_con; DESCRIPTION: 3A 1 Horizontal attachment 16P Female -25℃~+85℃ Type-C SMD USB Connectors ROHS; LCSC_PART: C2927038
X1 = ds_passive; DESCRIPTION: 12MHz Surface Mount Crystal 20pF ±10ppm ±20ppm SMD3225-4P Crystals ROHS; LCSC_PART: C20625731
X2 = ds_passive; DESCRIPTION: 25MHz Surface Mount Crystal 12pF ±10ppm ±20ppm SMD3225-4P Crystals ROHS; LCSC_PART: C9006